# Altium PCB main.PcbDoc
Units mm, origin at the board's own origin, x right, y up, seen from the top; angles counter-clockwise.
Board outline 36 x 35 mm, 4 copper layers (Top Layer, Power Layer 1, Power Layer 2, Bottom Layer), stack 0.971 mm thick; 100 components, 57 nets, 322 pads, 175 vias.
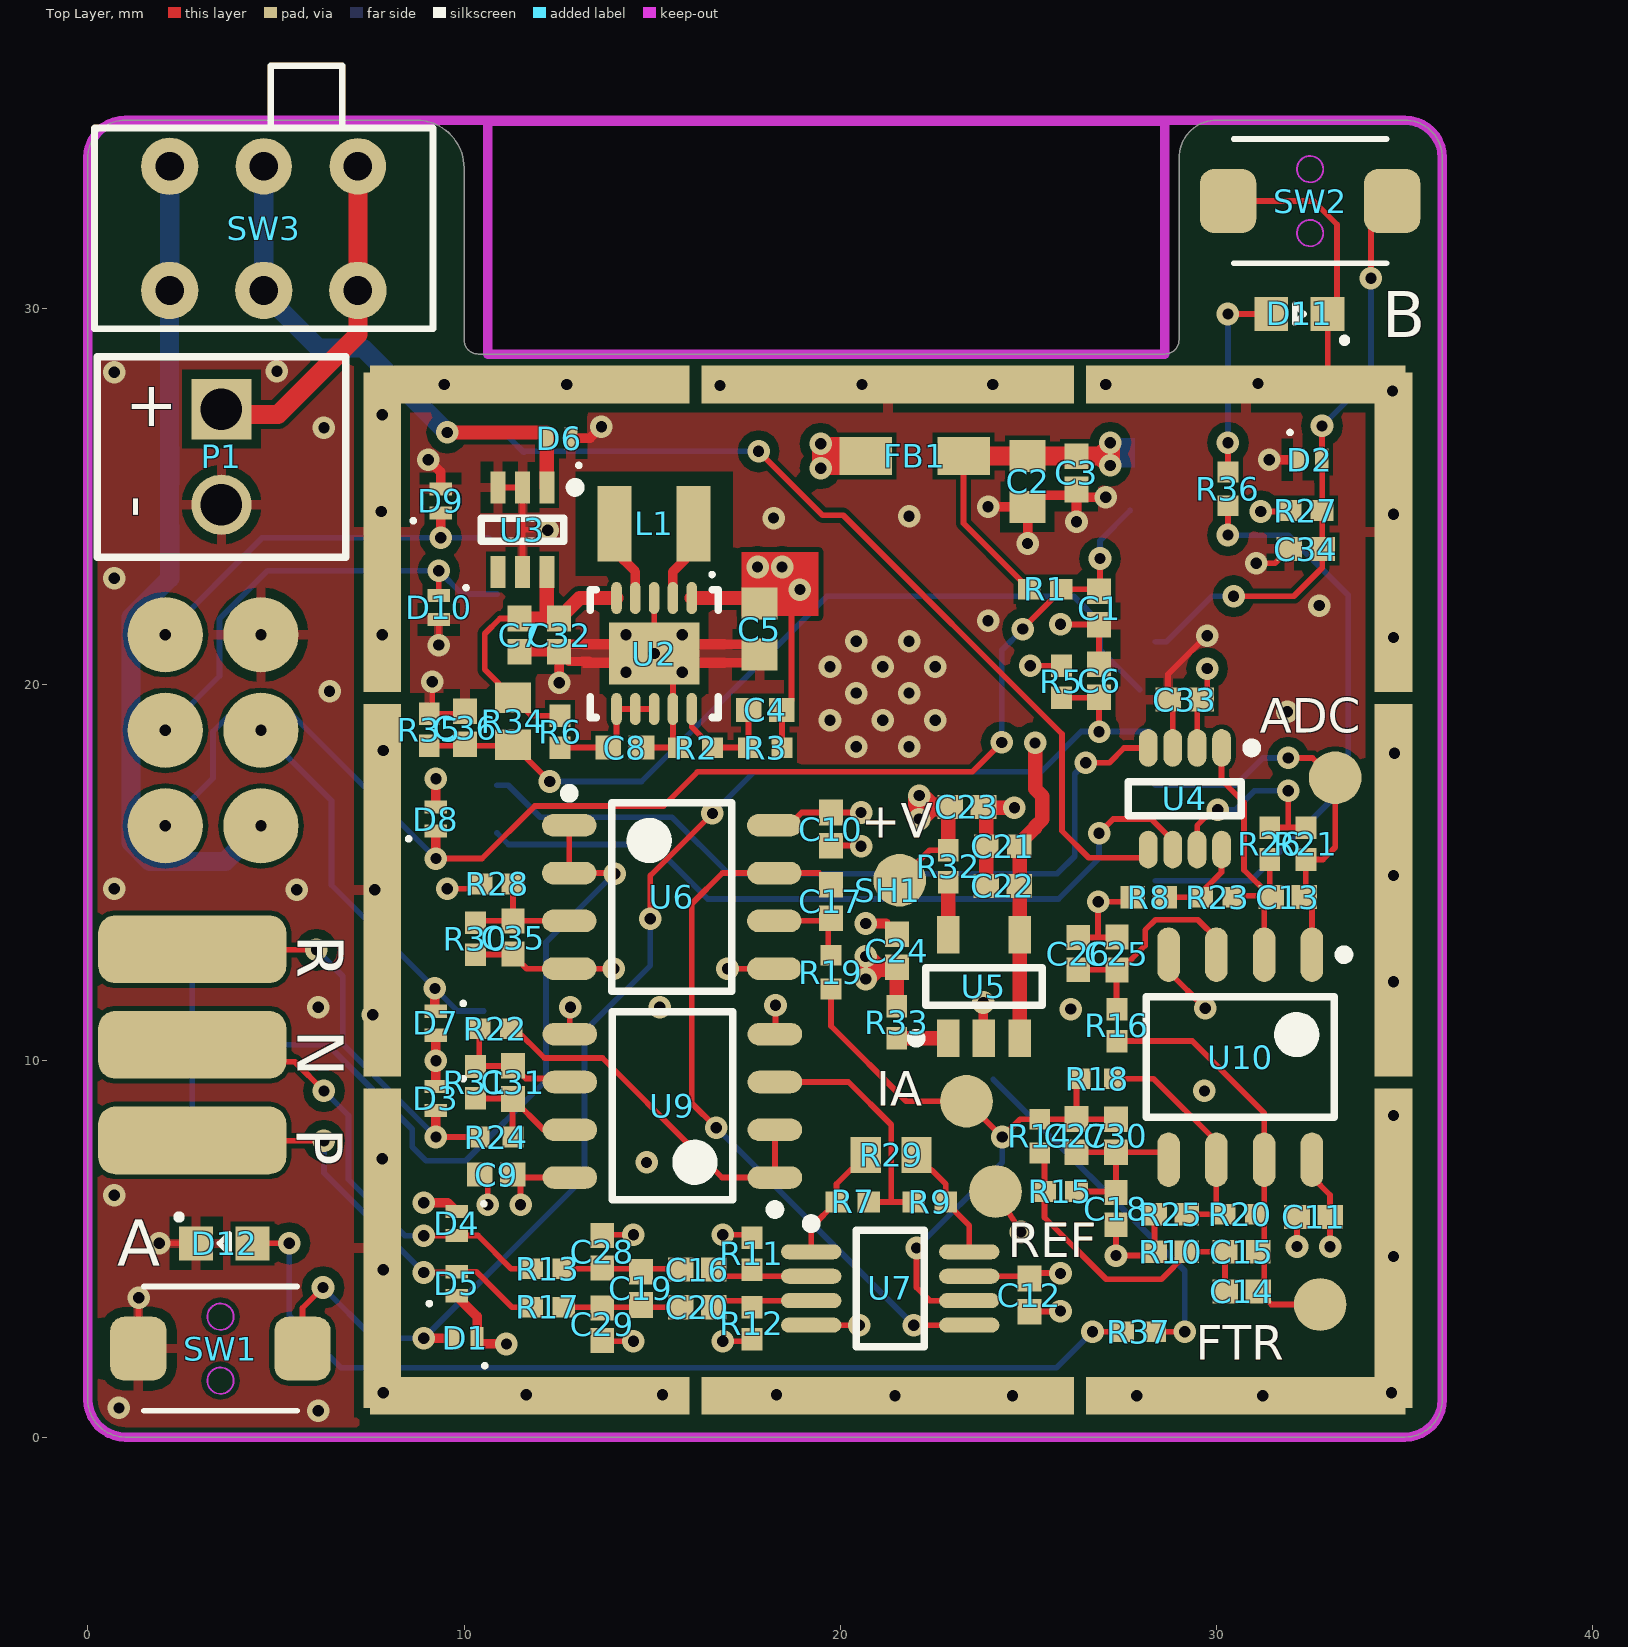
[diagram p0: Top Layer view]
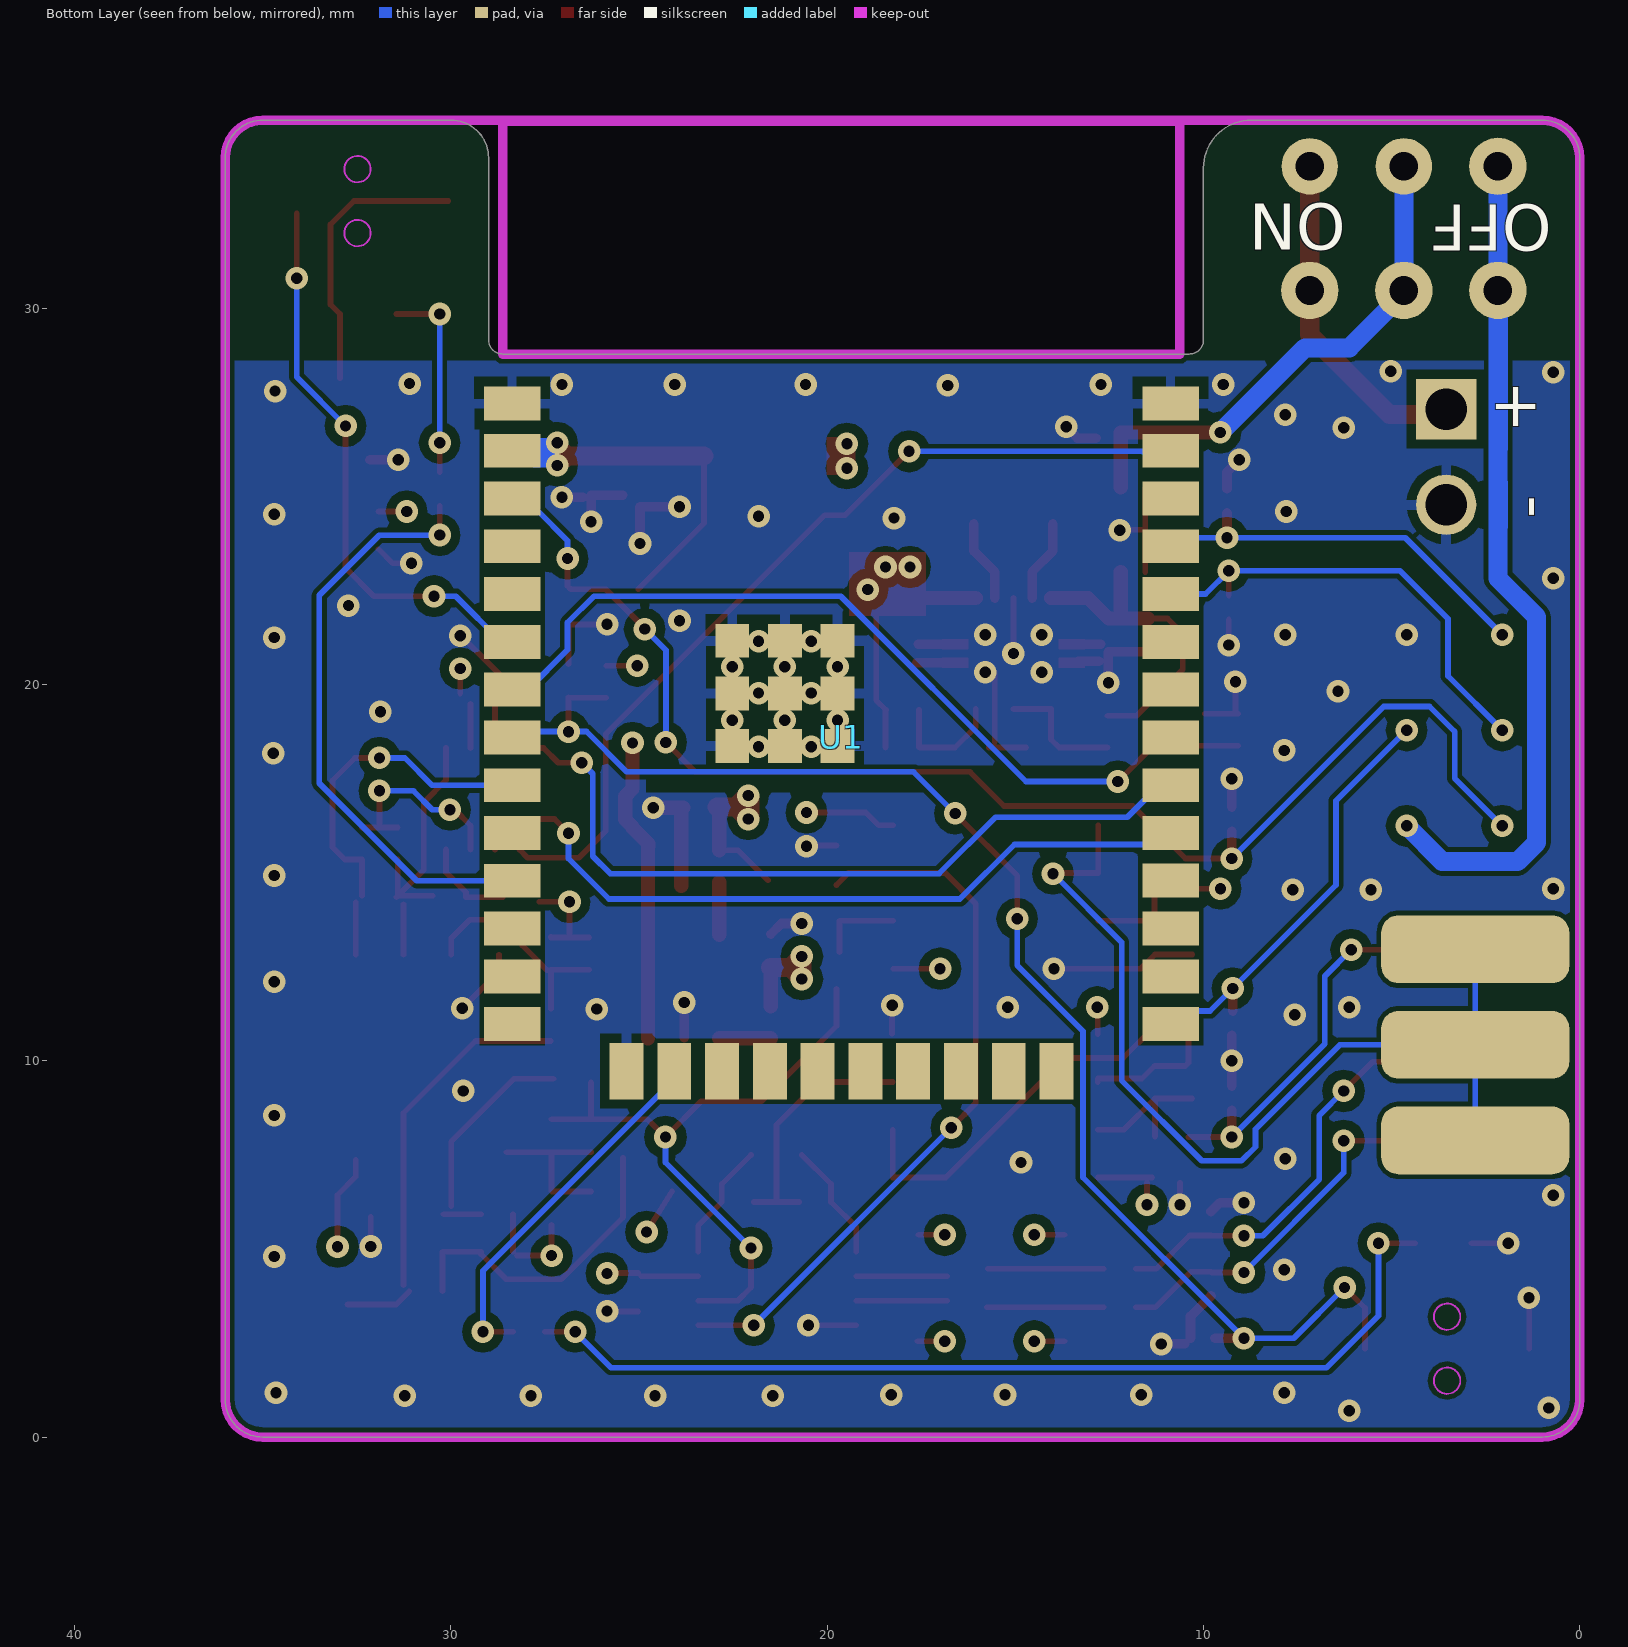
[diagram p1: Bottom Layer view, seen from below]
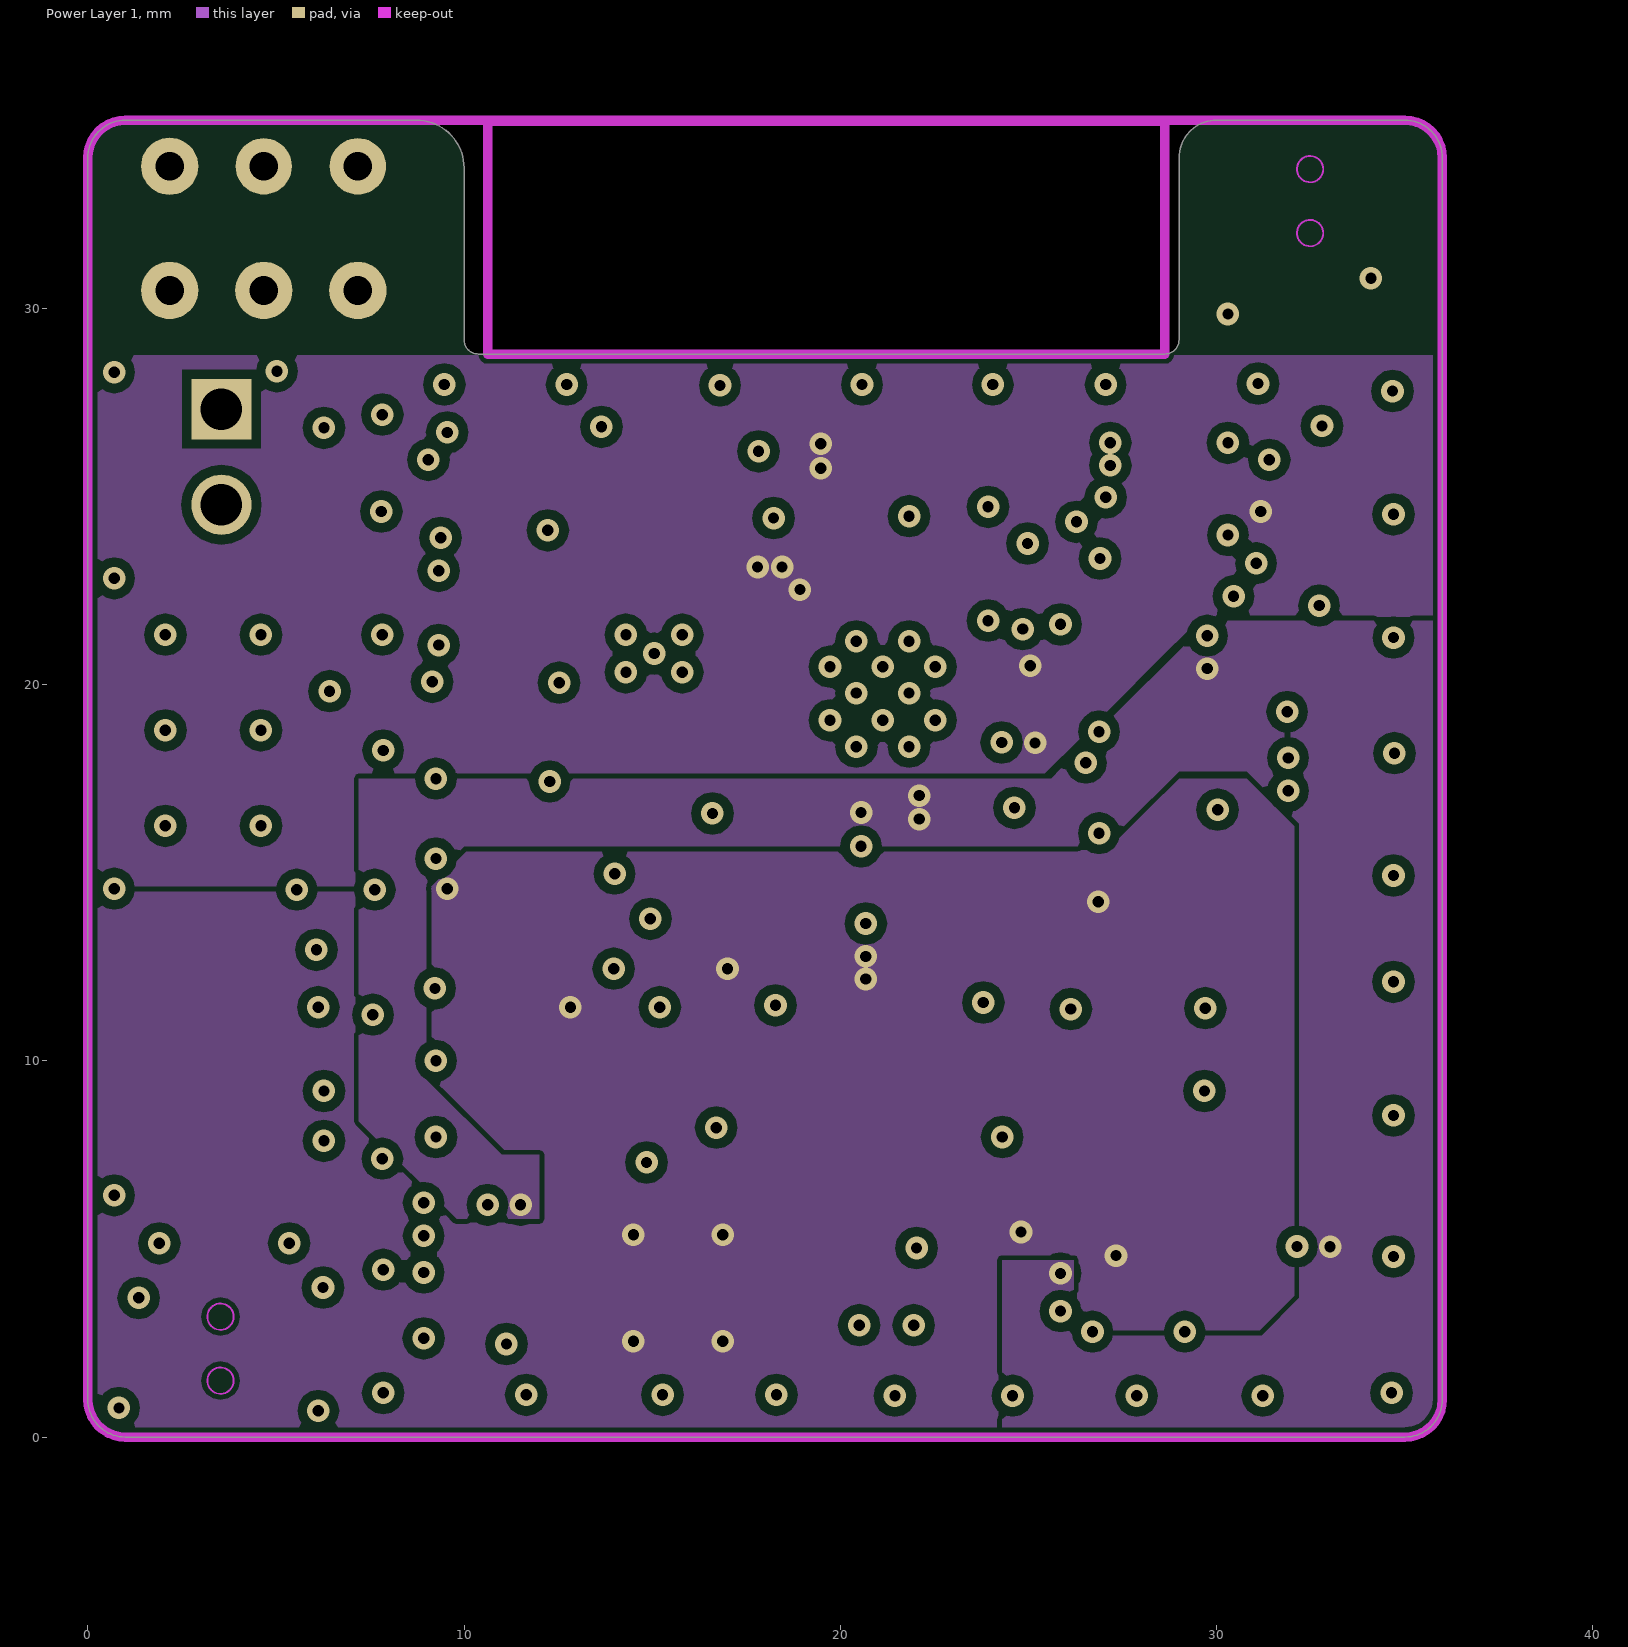
[diagram p2: Power Layer 1]
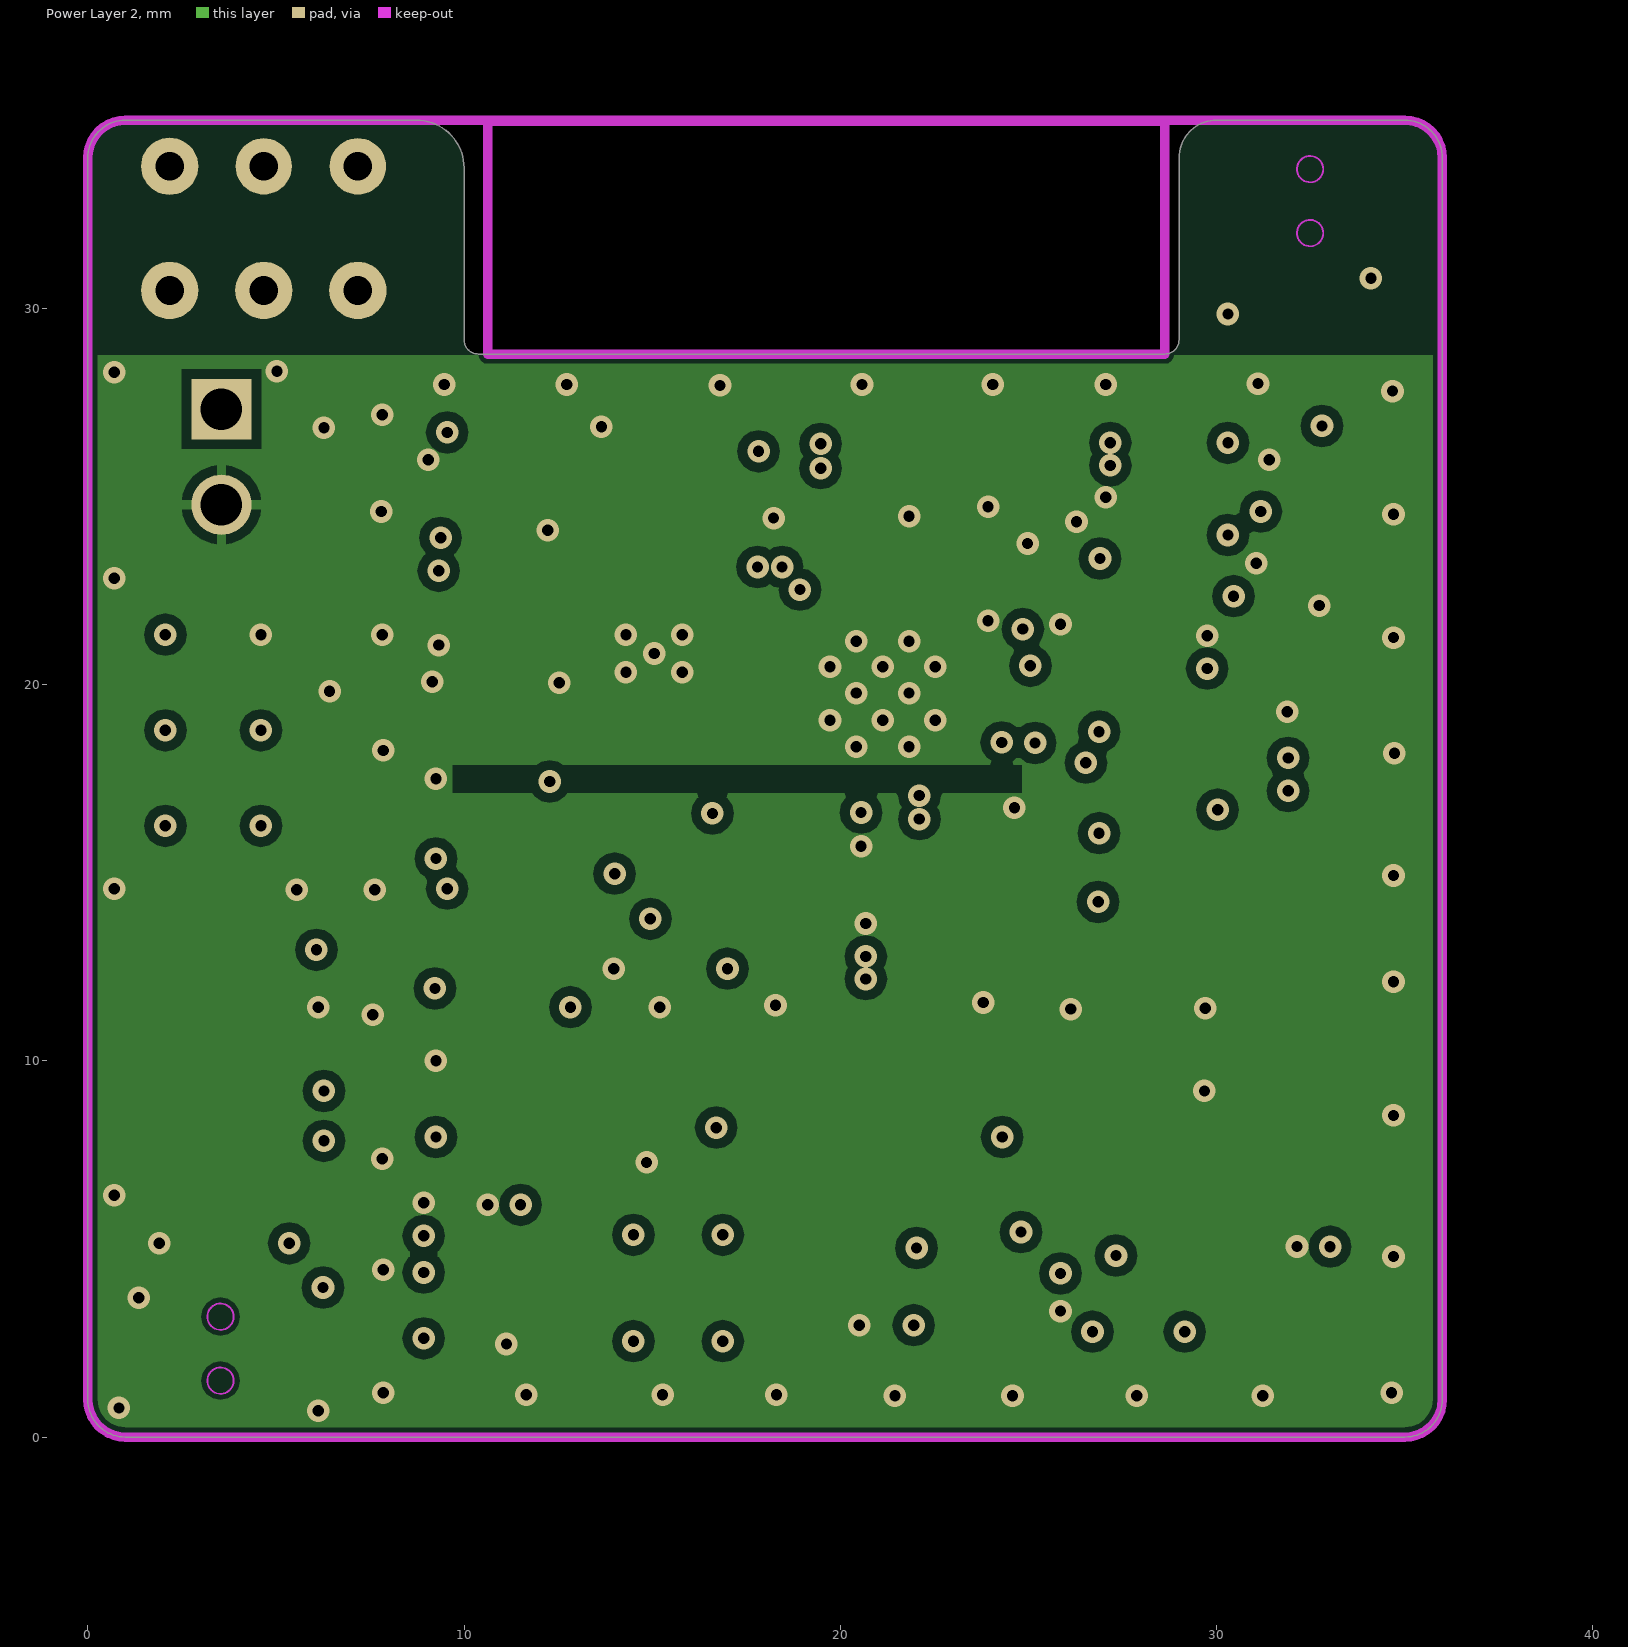
[diagram p3: Power Layer 2]

## Layer stack, top to bottom
Top Solder: solder mask 0.0127, Solder Resist, Dk 3.8
Top Layer: signal copper 0.035
7628: prepreg 0.2, FR-4, Dk 4.6
Power Layer 1: signal copper 0.0177
Core: core 0.465, FR-4, Dk 4.6
Power Layer 2: signal copper 0.0177
7628: prepreg 0.2, FR-4, Dk 4.6
Bottom Layer: signal copper 0.035
Bottom Solder: solder mask 0.0127, Solder Resist, Dk 3.8

## Board outline
0,1 ccw(c1,1) 1,0 35,0 ccw(c35,1) 36,1 36,34 ccw(c35,34) 35,35 30,35 ccw(c30,34) 29,34 29,29.16 cw(c28.625,29.16) 28.625,28.785 10.375,28.785 cw(c10.375,29.16) 10,29.16 10,33.73 ccw(c8.73,33.73) 8.73,35 1,35 ccw(c1,34) 0,34

## Design rules (kind name [scope] priority, off if disabled: settings)
AssemblyTestPointUsage AssemblyTestPointUsage_1 [All] p2:
AssemblyTestpoint AssemblyTestpoint_1 [All] p2: testpointundercomponent=TRUE minsize=1.016 maxsize=2.54 preferedsize=1.524 minholesize=0 maxholesize=1.016 preferedholesize=0.813 testpointgrid=0.025 usegrid=TRUE gridtolerance=0 allowsidetop=TRUE allowsidebottom=TRUE
Clearance [All] p1: gap=0.254 ignorepadtopadclearanceinfootprint=FALSE except(0: Arc-Hole Track-Hole SMDPad-Hole THPad-Hole Via-Hole Fill-Hole Poly-Hole Region-Hole Text-Hole)
Clearance RF_Clearance [InNetClass('RF')] p2: gap=0.254 ignorepadtopadclearanceinfootprint=FALSE except(0: Arc-Hole Track-Hole SMDPad-Hole THPad-Hole Via-Hole Fill-Hole Poly-Hole Region-Hole Text-Hole; 0.127: Arc-Arc Arc-Track Arc-SMDPad Arc-Fill Arc-Region Track-Track Track-SMDPad Track-Fill Track-Region SMDPad-SMDPad SMDPad-THPad SMDPad-Fill SMDPad-Region Fill-Fill Fill-Region Region-Region; 0.33: Arc-THPad Track-THPad; 0.54: THPad-THPad; 0.88: Arc-Poly Track-Poly SMDPad-Poly THPad-Poly Via-Poly Fill-Poly Poly-Poly Poly-Region Poly-Text)
Clearance Clearance_1 [All] p3: gap=0.254 ignorepadtopadclearanceinfootprint=FALSE except(0: Arc-Hole Track-Hole SMDPad-Hole THPad-Hole Via-Hole Fill-Hole Poly-Hole Region-Hole Text-Hole; 0.127: Arc-Arc Arc-Track Arc-SMDPad Arc-Fill Arc-Poly Arc-Region Track-Track Track-SMDPad Track-Fill Track-Poly Track-Region SMDPad-SMDPad SMDPad-THPad SMDPad-Fill SMDPad-Poly SMDPad-Region Fill-Fill Fill-Poly Fill-Region Poly-Poly Poly-Region Region-Region; 0.33: Arc-THPad Track-THPad; 0.54: THPad-THPad)
ComponentClearance ComponentClearance_1 [All] p2 off: gap=0.254 collisioncheckmode=3 verticalgap=0.254 showdistances=FALSE
DiffPairsRouting DiffPairsRouting_1 [All] p2: maxlimit=0.254 minlimit=0.254 mostfreqgap=0.254 toplayer_minwidth=0.381 toplayer_maxwidth=0.381 toplayer_prefwidth=0.381 midlayer1_minwidth=0.381 midlayer1_maxwidth=0.381 midlayer1_prefwidth=0.381 midlayer2_minwidth=0.381 midlayer2_maxwidth=0.381 midlayer2_prefwidth=0.381 bottomlayer_minwidth=0.381 bottomlayer_maxwidth=0.381 bottomlayer_prefwidth=0.381 maxuncoupledlength=12.7
FabricationTestPointUsage FabricationTestPointUsage_1 [All] p2: valid=0 allowmultiple=FALSE
FabricationTestpoint FabricationTestpoint_1 [All] p2: side=3 testpointundercomponent=TRUE minsize=1.016 maxsize=2.54 preferedsize=1.524 minholesize=0 maxholesize=1.016 preferedholesize=0.813 testpointgrid=0.025 allowsidetop=TRUE allowsidebottom=TRUE usegrid=TRUE gridtolerance=0
FanoutControl Fanout_LCC [IsLCC] p1: bgadir=Out bgaviamode=Centered fanoutstyle=Auto fanoutdirection=Alternating viagrid=0.025 // Fanout_LCC (Default Rule)
FanoutControl Fanout_BGA [IsBGA] p2: bgadir=Out bgaviamode=Centered fanoutstyle=Auto fanoutdirection=Alternating viagrid=0.025 // Fanout_BGA (Default Rule)
FanoutControl Fanout_Default [All] p4: bgadir=Out bgaviamode=Centered fanoutstyle=Auto fanoutdirection=Alternating viagrid=0.025 // Fanout_Default (Default Rule)
FanoutControl Fanout_Small [(CompPinCount < 5)] p5: bgadir=Out bgaviamode=Centered fanoutstyle=Auto fanoutdirection=OutThenIn viagrid=0.025 // Fanout_Small (Default Rule)
FanoutControl Fanout_BGA_1 [IsBGA] p6: bgadir=Out bgaviamode=Centered fanoutstyle=Auto fanoutdirection=Alternating viagrid=0.025 // Fanout_BGA (Default Rule)
FanoutControl Fanout_LCC_1 [IsLCC] p7: bgadir=Out bgaviamode=Centered fanoutstyle=Auto fanoutdirection=Alternating viagrid=0.025 // Fanout_LCC (Default Rule)
FanoutControl Fanout_SOIC_1 [IsSOIC] p8: bgadir=Out bgaviamode=Centered fanoutstyle=Auto fanoutdirection=Alternating viagrid=0.025 // Fanout_SOIC (Default Rule)
FanoutControl Fanout_Small_1 [(CompPinCount < 5)] p9: bgadir=Out bgaviamode=Centered fanoutstyle=Auto fanoutdirection=OutThenIn viagrid=0.025 // Fanout_Small (Default Rule)
FanoutControl Fanout_Default_1 [All] p10: bgadir=Out bgaviamode=Centered fanoutstyle=Auto fanoutdirection=Alternating viagrid=0.025 // Fanout_Default (Default Rule)
Height Height_1 [All] p2: minheight=0 maxheight=25.4 prefheight=12.7
HoleSize HoleSize_1 [All] p2: absolutevalues=TRUE maxlimit=6.35 minlimit=0.02 maxpercent=80.000 minpercent=20.000
HoleToHoleClearance HoleToHoleClearance_1 [All] p2: gap=0.254 allowstackedmicrovias=TRUE
LayerPairs LayerPairs_1 [All] p2: enforce=TRUE
MinimumAnnularRing [All] p1: minimumring=0.13
MinimumSolderMaskSliver MinimumSolderMaskSliver_1 [All] p2: minsoldermaskwidth=0.2
NetAntennae NetAntennae_1 [All] p2: netantennaetolerance=0
PasteMaskExpansion PasteMaskExpansion_1 [All] p2: expansion=0
PlaneClearance PlaneClearance_1 [All] p2: clearance=0.508
PlaneConnect PlaneConnect_1 [All] p2: planeconnectstyle=Direct reliefexpansion=0.508 reliefentries=4 reliefconductorwidth=0.254 reliefairgap=0.254
PolygonConnect [All] p1: connectstyle=Relief reliefconductorwidth=0.254 reliefentries=4 polygonreliefangle="90 Angle" airgapwidth=0.254
PolygonConnect PolygonConnect_Via [IsVia] p2: connectstyle=Direct reliefconductorwidth=0.254 reliefentries=4 polygonreliefangle="90 Angle" airgapwidth=0.254
PolygonConnect PolygonConnect_1 [All] p3: connectstyle=Relief reliefconductorwidth=0.254 reliefentries=4 polygonreliefangle="90 Angle" airgapwidth=0.254
RoutingCorners RoutingCorners_1 [All] p2: cornerstyle=45-Degree minsetback=2.54 maxsetback=2.54
RoutingLayers RoutingLayers_1 [All] p2: top layer_v5=TRUE mid layer 1_v5=TRUE mid layer 2_v5=TRUE bottom layer_v5=TRUE
RoutingPriority RoutingPriority_1 [All] p2: routingpriority=0
RoutingTopology RoutingTopology_1 [All] p2: topology=Shortest
RoutingVias [All] p1: holewidth=0.711 width=1.27 viastyle="Through Hole" minholewidth=0.711 minwidth=1.27 maxholewidth=0.711 maxwidth=1.27
RoutingVias RoutingVias_1 [All] p2: holewidth=1 width=0.6 viastyle="Through Hole" minholewidth=0.2 minwidth=0.45 maxholewidth=6.3 maxwidth=7
ShortCircuit ShortCircuit_1 [All] p2: allowed=FALSE
SilkToBoardRegionClearance SilkToBoardRegionClearance_1 [All] p2:
SilkToSilkClearance SilkToSilkClearance_1 [All] p2: silktosilkclearance=0.15
SilkToSolderMaskClearance SilkToSolderMaskClearance_1 [IsPad] p2: minsilkscreentomaskgap=0.15 clearancetoexposedcopper=TRUE
SolderMaskExpansion [All] p1: expansion=0.102 istentingtop=FALSE
SolderMaskExpansion SolderMaskExpansion_1 [All] p2: expansion=0.102 istentingtop=FALSE
UnRoutedNet UnRoutedNet_1 [All] p2:
UnpouredPolygon UnpouredPolygon_1 [All] p2:
Width [All] p1: maxlimit=0.254 minlimit=0.254 preferedwidth=0.254
Width Width_1 [All] p2: maxlimit=2.54 minlimit=0.089 preferedwidth=0.254 midlayer1_minwidth=0.127 midlayer1_maxwidth=1.27 midlayer2_minwidth=0.127 midlayer2_maxwidth=1.27 minimp=50.000000 maximp=50.000000 favimp=50.000000
26 further rules are at their usual default settings.

## Components (designator, comment, footprint, x,y, rotation, side; value= is the part's Value field where it differs from the comment)
C1 "100nF" CAPC1005X56X25NL10T15 26.875,22.035 r270 top
C2 "Murata GRM188R60G226MEA0L" CAPC1608X90X35NL10T15 24.975,25.4 r270 top
C3 "100nF" CAPC1005X56X25NL10T15 26.275,25.625 r270 top
C4 "AVX Interconnect / Elco 04025A6R0DAT2A" CAPC1005X60X25NL10T15 18,19.325 r180 top
C5 "Murata GRM188R60G226MEA0L" CAPC1608X90X35NL10T15 17.85,21.475 r270 top
C6 "100nF" CAPC1005X56X25NL10T15 26.875,20.1 r90 top
C7 "100nF" CAPC1005X56X25NL10T15 11.475,21.315 r270 top
C8 "100nF" CAPC1005X56X25NL10T15 14.275,18.325 r0 top
C9 "100nF" CAPC1005X56X25NL10T15 10.85,6.975 r180 top
C10 "100nF" CAPC1005X56X25NL10T15 19.75,16.16 r270 top
C11 "100nF" CAPC1005X56X25NL10T15 32.575,5.85 r180 top
C12 "100nF" CAPC1005X56X25NL10T15 25.025,3.775 r270 top
C13 "AVX Interconnect / Elco 04025C152KAT2A" CAPC1005X56X25NL10T15 31.89,14.35 r180 top
C14 "AVX Interconnect / Elco 0402ZD474KAT2A" CAPC1005X56X25NL10T15 30.665,3.875 r0 top
C15 "CL05A334KQ5NNNC" CAPC1005X55X25NL05T10 30.665,4.925 r180 top
C16 "CL05A475MP5NRNC" CAPC1005X56X25NL10T15 16.2,4.45 r0 top
C17 "Samsung CL05A105KA5NQNC" PCB-515da9ytrm2wahx6tw11-1 19.75,14.235 r90 top
C18 "Kemet C0402C683K4RACTU" CAPC1005X55X30NL05T10 27.325,6.075 r90 top
C19 "AVX Interconnect / Elco 04025C332KAT2A" CAPC1005X56X25NL10T15 14.7,3.95 r90 top
C20 "CL05A475MP5NRNC" CAPC1005X56X25NL10T15 16.2,3.45 r180 top
C21 "Murata GRM155R61C105KA12D" CAPC1005X55X25NL05T10 24.315,15.7 r180 top
C22 "100nF" CAPC1005X56X25NL10T15 24.315,14.65 r180 top
C23 "100nF" CAPC1005X56X25NL10T15 23.365,16.75 r0 top
C24 "100nF" CAPC1005X56X25NL10T15 21.5,12.925 r90 top
C25 "CL05A334KQ5NNNC" CAPC1005X55X25NL05T10 27.35,12.85 r270 top
C26 "Kemet C0402C683K4RACTU" CAPC1005X55X30NL05T10 26.325,12.85 r270 top
C27 "AVX Interconnect / Elco 04023C473KAT2A" CAPC1005X56X25NL10T15 26.275,8.015 r270 top
C28 "Kemet C0402C221K5RACAUTO" CAPC1005X55X30NL05T10 13.675,4.925 r90 top
C29 "Kemet C0402C221K5RACAUTO" CAPC1005X55X30NL05T10 13.675,3 r270 top
C30 "100nF" CAPC1005X56X25NL10T15 27.325,8.01 r270 top
C31 "AVX Interconnect / Elco 04025A151JAT2A" CAPC1005X56X25NL10T15 11.3,9.425 r90 top
C32 "Samsung CL05A106MQ5NUNC" PCB-a41llqp6xpt8gy62f2hk-1 12.525,21.315 r270 top
C33 "100nF" CAPC1005X56X25NL10T15 29.15,19.6 r180 top
C34 "100nF" CAPC1005X56X25NL10T15 32.365,23.6 r180 top
C35 "Murata GRM155R61C105KA12D" CAPC1005X55X25NL05T10 11.3,13.275 r270 top
C36 "100nF" CAPC1005X56X25NL10T15 10.025,18.85 r90 top
D1 "LESD8D3.3CT5G" DFN64P100X50-2N 10.025,2.625 r180 top
D2 "LESD8D3.3CT5G" DFN64P100X50-2N 32.475,25.975 r0 top
D3 "LESD8D3.3CT5G" DFN64P100X50-2N 9.25,9 r270 top
D4 "LESD8D3.3CT5G" DFN64P100X50-2N 9.8,5.675 r270 top
D5 "LESD8D3.3CT5G" DFN64P100X50-2N 9.8,4.075 r90 top
D6 "LESD8D3.3CT5G" DFN64P100X50-2N 12.525,26.55 r180 top
D7 "LESD8D3.3CT5G" DFN64P100X50-2N 9.25,11 r270 top
D8 "LESD8D3.3CT5G" DFN64P100X50-2N 9.25,16.425 r90 top
D9 "LESD8D3.3CT5G" DFN64P100X50-2N 9.375,24.88 r90 top
D10 "LESD8D3.3CT5G" DFN64P100X50-2N 9.325,22.05 r270 top
D11 "19-217/GHC-YR1S2/3T" PCB-qrh50x9m6cshxb6d9t7t-1 32.2,29.85 r180 top
D12 "KT-0603R" PCB-qrh50x9m6cshxb6d9t7t-1 3.625,5.15 r0 top
FB1 "GZ2012D601TF" MURA-BLM21-H1-CHIP-2_V 21.975,26.075 r0 top
L1 "Laird MGV252012S2R2M-10" INDM2520X12N 15.05,24.275 r0 top
P1 "TE 282834-2" PCB-6xrngco598u3mra2uzi2-1 3.55,26.05 r270 top
R1 "Yageo / Phycomp RC0402FR-1310KL" RESC1005X40X25NL05T10 25.45,22.535 r0 top
R2 "Panasonic ERJ-2RKF8872X" RESC1005X40X25NL05T05 16.15,18.325 r0 top
R3 "Vishay Dale CRCW0402510KFKED" RESC1005X40X25NL05T05 18,18.325 r0 top
R5 "Yageo / Phycomp RC0402FR-1310KL" RESC1005X40X25NL05T10 25.875,20.075 r270 top
R6 "Yageo RC0402FR-13100RL" RESC1005X40X25NL05T10 12.55,18.75 r90 top
R7 "Yageo / Phycomp RC0402FR-0724KL" RESC1005X40X25NL05T10 20.325,6.25 r0 top
R8 "KOA Speer RK73H1ETTP1001F" RESC1005X40X25NL10T10 28.2,14.35 r180 top
R9 "Yageo / Phycomp RC0402FR-0724KL" RESC1005X40X25NL05T10 22.375,6.25 r0 top
R10 "KOA Speer RK73H1ETTP2003F" RESC1005X40X25NL10T10 28.775,4.925 r0 top
R11 "Yageo RC0402FR-13100KL" RESC1005X40X25NL05T10 17.65,4.875 r270 top
R12 "Yageo RC0402FR-13100KL" RESC1005X40X25NL05T10 17.65,3.025 r90 top
R13 "Yageo RC0402FR-13100KL" RESC1005X40X25NL05T10 12.225,4.475 r180 top
R14 "Vishay Dale CRCW04026K80FKED" RESC1005X40X25NL05T05 25.3,8 r270 top
R15 "Yageo / Phycomp RC0402FR-0716KL" RESC1005X40X25NL05T10 25.85,6.525 r0 top
R16 "Yageo / Phycomp RC0402FR-0711KL" RESC1005X40X25NL05T10 27.35,10.95 r270 top
R17 "Yageo RC0402FR-13100KL" RESC1005X40X25NL05T10 12.225,3.45 r180 top
R18 "Panasonic ERJ-2RKF2002X" RESC1005X40X25NL05T05 26.825,9.525 r180 top
R19 "Vishay Dale CRCW0402330KFKED" RESC1005X40X25NL05T05 19.75,12.36 r270 top
R20 "Yageo / Phycomp RC0402FR-1310KL" RESC1005X40X25NL05T10 30.625,5.925 r180 top
R21 "Yageo AC0402FR-078K2L" RESC1005X37X25NL05T10 32.375,15.775 r270 top
R22 "Yageo / Phycomp RC0402FR-1310KL" RESC1005X40X25NL05T10 10.825,10.85 r0 top
R23 "Yageo / Phycomp RC0402FR-1310KL" RESC1005X40X25NL05T10 30.025,14.35 r0 top
R24 "Vishay Dale CRCW0402330KFKED" RESC1005X40X25NL05T05 10.85,7.975 r0 top
R25 "KOA Speer RK73H1ETTP2003F" RESC1005X40X25NL10T10 28.775,5.925 r0 top
R26 "Yageo / Phycomp RC0402FR-1310KL" RESC1005X40X25NL05T10 31.415,15.775 r270 top
R27 "Yageo / Phycomp RC0402FR-1310KL" RESC1005X40X25NL05T10 32.375,24.625 r0 top
R28 "Yageo AC0402JR-070RL" RESC1005X37X25NL05T10 10.875,14.7 r180 top
R29 "Panasonic ERJ-3EKF71R5V" RESC1608X55X30NL15T15 21.35,7.5 r0 top
R30 "Yageo AC0402JR-070RL" RESC1005X37X25NL05T10 10.3,13.25 r90 top
R31 "Yageo AC0402FR-071ML" RESC1005X37X25NL05T10 10.3,9.425 r270 top
R32 "Yageo AC0402JR-070RL" RESC1005X37X25NL05T10 22.865,15.175 r270 top
R33 "Yageo AC0402JR-070RL" RESC1005X37X25NL05T10 21.5,11.025 r270 top
R34 "Vishay Dale CRCW0603680KFKEA" RESC1609X50X30NL10T20 11.3,19.025 r270 top
R35 "Yageo AC0402FR-071ML" RESC1005X37X25NL05T10 9.075,18.8 r90 top
R36 "Vishay Dale CRCW0402220RFKED" RESC1005X40X25NL05T05 30.3,25.2 r270 top
R37 "Panasonic ERJ-U02F1001X" RESC1005X40X25NL05T10 27.925,2.8 r0 top
SH1 "Leader Tech SMS-403C" PCB-mz3zksww60jqn1djdwiu-1 34.7,27.975 r270 top locked
SW1 "TS-1185-C-A-A-A" PCB-qarcnbrnejma51b9hfzm-1 3.525,2.35 r0 top
SW2 "TS-1185-C-A-A-A" PCB-qarcnbrnejma51b9hfzm-1 32.484,32.85 r0 top
SW3 "JS202011AQN" PCB-wbq3apgbd2bliremr4t3-1 9.175,30.475 r180 top
U1 "Espressif Systems ESP32-WROOM-32E" ESP32-WROOM-32E 28.625,9.475 r180 bottom locked
U2 "TPS63000DRCRG4" DRC10-2400X1650TP 15.05,20.825 r270 top
U3 "LM66100DCKR" TSOP65P210X110-6N 11.55,24.115 r270 top
U4 "Analog Devices AD5160BRJZ10-RL7" TSOP65P280X145-8N 29.157,16.966 r270 top
U5 "REF1933AIDDCT" SOT95P280X100-5N 23.815,11.975 r90 top
U6 "MCP6002T-I/SN" SOIC127P600X175-8N 15.519,14.355 r0 top
U7 "INA126EA/2K5" TI-DGK8_N 21.325,3.95 r0 top
U9 "MCP6002T-I/SN" SOIC127P600X175-8N 15.535,8.803 r180 top
U10 "MCP6002T-I/SN" SOIC127P600X175-8N 30.628,10.097 r270 top

## Footprints (in the part's own frame and the unit in brackets; to place one, negate y for a bottom-side part, rotate by r counter-clockwise, add the part's x,y. Pads: shape width x height; smd on the part's side, far side on the other; paste and mask are expansions set on the pad)
CAPC1005X55X25NL05T10 [mm] "CAPC1005X55X25NL05T10"
  rect 0.66x0.62 smd: 1(-0.44,0) 2(0.44,0)
  body extent -0.53,-0.28 0.53,0.27, height 0.55
CAPC1005X55X30NL05T10 [mm] "CAPC1005X55X30NL05T10"
  rect 0.66x0.62 smd: 1(-0.43,0) 2(0.43,0)
  body extent -0.53,-0.28 0.53,0.27, height 0.55
CAPC1005X56X25NL10T15 [mm] "CAPC1005X56X25NL10T15"
  rect 0.68x0.64 smd: 1(-0.44,0) 2(0.44,0)
  body extent -0.55,-0.3 0.55,0.3, height 0.56
CAPC1005X60X25NL10T15 [mm] "CAPC1005X60X25NL10T15"
  rect 0.68x0.64 smd: 1(-0.44,0) 2(0.44,0)
  body extent -0.55,-0.3 0.55,0.3, height 0.6
CAPC1608X90X35NL10T15 [mm] "CAPC1608X90X35NL10T15"
  rect 0.85x0.95 smd: 1(-0.675,0) 2(0.675,0)
  body extent -0.85,-0.45 0.85,0.45, height 0.9
DFN64P100X50-2N [mm] "DFN, 2-Leads, Body 0.60x1.00mm, Pitch 0.64mm, IPC Medium Density"
  rect 0.35x0.6 smd: 1(-0.32,0) 2(0.32,0)
  silkscreen extent -0.58,0.68 -0.48,0.77, body extent -0.53,-0.33 0.53,0.33, height 0.5
DRC10-2400X1650TP [mm] "SON, 10-Leads, Body 3x3mm, Pitch 0.5mm, Thermal Pad 2.4x1.65mm, TI Recommended"
  oval 0.85x0.28 smd paste-0.025 mask+0.07: 1(-1.475,1) 2(-1.475,0.5) 3(-1.475,0) 4(-1.475,-0.5) 5(-1.475,-1) 6(1.475,-1) 7(1.475,-0.5) 8(1.475,0) 9(1.475,0.5) 10(1.475,1)
  rect 1.65x2.4 smd paste-0.825 mask+0.07: 11(0,0)
  Top Layer region: -0.39,1.2 -0.11,1.2 -0.11,1.9 -0.39,1.9
  Top Layer region: 0.39,1.9 0.11,1.9 0.11,1.2 0.39,1.2
  Top Layer region: 0.39,-1.2 0.11,-1.2 0.11,-1.9 0.39,-1.9
  Top Layer region: -0.39,-1.9 -0.11,-1.9 -0.11,-1.2 -0.39,-1.2
  silkscreen extent -2.15,-1.7 1.7,1.7, body extent -1.55,-1.55 1.55,1.55, height 1
ESP32-WROOM-32E [mm] "ESP32-WROOM-32E"
  rect 1.5x0.9 smd: 1(0.25,18) 2(0.25,16.74) 3(0.25,15.47) 4(0.25,14.2) 5(0.25,12.93) 6(0.25,11.66) 7(0.25,10.39) 8(0.25,9.12) 9(0.25,7.85) 10(0.25,6.58) 11(0.25,5.31) 12(0.25,4.04) 13(0.25,2.77) 14(0.25,1.5) 25(17.75,1.5) 26(17.75,2.77) 27(17.75,4.04) 28(17.75,5.32) 29(17.75,6.58) 30(17.75,7.85) 31(17.75,9.12) 32(17.75,10.39) 33(17.75,11.66) 34(17.75,12.93) 35(17.75,14.2) 36(17.75,15.47) 37(17.75,16.74) 38(17.75,18)
  rect 0.9x1.5 smd: 15(3.29,0.25) 16(4.56,0.25) 17(5.83,0.25) 18(7.1,0.25) 19(8.37,0.25) 20(9.64,0.25) 21(10.91,0.25) 22(12.18,0.25) 23(13.45,0.25) 24(14.72,0.25)
  rect 0.9x0.9 smd: 39(6.1,8.89) 39(6.1,10.29) 39(6.1,11.69) 39(7.5,8.89) 39(7.5,10.29) 39(7.5,11.69) 39(8.9,8.89) 39(8.9,10.29) 39(8.9,11.69)
  Keep-Out Layer lines w0.254: 18,19.31 0,19.31 0,25.5 18,25.5 18,19.31
  body extent 0,0 18,25.5, height 3.2
INDM2520X12N [mm] "Molded Inductor, 2-Leads, Body 2.50x2.00mm, IPC Medium Density"
  rect 0.9x2 smd: 1(-1.05,0) 2(1.05,0)
  body extent -1.35,-1.1 1.35,1.1, height 1.2
MURA-BLM21-H1-CHIP-2_V [mm] "Chip Ferrite Bead, 2-Leads, Body 2x1.25mm, Height 1.05mm"
  rect 1.4x1 smd: 1(-1.3,0) 2(1.3,0)
  body extent -1,-0.63 1,0.63, height 1.05
PCB-6xrngco598u3mra2uzi2-1 [mm] "terminal block 2x20cts, Pitch 2.54mm"
  rect 1.6x1.6 hole 1.1: 1(-1.27,0)
  round 1.6 hole 1.1: 2(1.27,0)
  silkscreen extent -2.67,-3.3 2.67,3.3, body extent -2.77,-3.25 2.77,3.25, height 10.16
PCB-515da9ytrm2wahx6tw11-1 [mm] "CAPC1005X56X25NL10T15"
  rect 0.68x0.64 smd: 1(-0.44,0) 2(0.44,0)
  body extent -0.55,-0.3 0.55,0.3, height 0.56
PCB-a41llqp6xpt8gy62f2hk-1 [mm] "CAPC1005X56X25NL10T15"
  rect 0.68x0.64 smd: 1(-0.44,0) 2(0.44,0)
  body extent -0.55,-0.3 0.55,0.3, height 0.56
PCB-mz3zksww60jqn1djdwiu-1 [mm]
  rect 1x8.5 smd: 1(0,-3.925) 1(0,-22.955) 1(26.88,-3.925) 1(26.88,-22.955)
  rect 1x9.9 smd: 1(0,-13.44) 1(26.88,-13.44)
  rect 8.5x1 smd: 1(3.925,0) 1(3.925,-26.88) 1(22.955,0) 1(22.955,-26.88)
  rect 9.9x1 smd: 1(13.44,0) 1(13.44,-26.88)
PCB-qarcnbrnejma51b9hfzm-1 [mm]
  rrect50% 1.5x1.7 smd: 1(-2.18,0) 2(2.18,0)
  Keep-Out Layer circle w0.051: c0,-0.85 r0.35
  Keep-Out Layer circle w0.051: c0,0.85 r0.35
  Multi-Layer pour cut-out: 0,0.5 -0.134,0.527 -0.247,0.603 -0.323,0.716 -0.35,0.85 -0.35,0.85 -0.35,0.85 -0.323,0.984 -0.247,1.097 -0.134,1.173 0,1.2 0,1.2 0,1.2 0.134,1.173 0.247,1.097 0.323,0.984 0.35,0.85 0.35,0.85 0.323,0.716 0.247,0.603 0.134,0.527 0,0.5
  silkscreen extent -2.03,-1.65 2.03,1.65, body extent -2.5,-1.5 2.5,1.5, height 2
PCB-qrh50x9m6cshxb6d9t7t-1 [mm] "DSMD0603GRID25PAD90"
  rect 0.9x0.9 smd: 1(0.75,0) 2(-0.75,0)
  silkscreen extent -1.28,-0.25 0.13,0.77, body extent -0.87,-0.48 0.87,0.47, height 0.92
PCB-wbq3apgbd2bliremr4t3-1 [mm]
  round 1.5 hole 0.75: 1(2,-3.3) 2(4.5,-3.3)
  round 1.524 hole 0.762: 3(7,-3.3) 4(2,0) 5(4.5,0) 6(7,0)
  silkscreen extent 0,-5.97 9,1.02, body extent 0,-5.45 9,0.15, height 3.22
RESC1005X37X25NL05T10 [mm] "RESC1005X37X25NL05T10"
  rect 0.6x0.55 smd: 1(-0.425,0) 2(0.425,0)
  body extent -0.53,-0.27 0.53,0.28, height 0.37
RESC1005X40X25NL05T05 [mm] "RESC1005X40X25NL05T05"
  rect 0.55x0.55 smd: 1(-0.45,0) 2(0.45,0)
  body extent -0.53,-0.27 0.53,0.28, height 0.4
RESC1005X40X25NL05T10 [mm] "RESC1005X40X25NL05T10"
  rect 0.6x0.55 smd: 1(-0.425,0) 2(0.425,0)
  body extent -0.53,-0.27 0.53,0.28, height 0.4
RESC1005X40X25NL10T10 [mm] "RESC1005X40X25NL10T10"
  rect 0.65x0.6 smd: 1(-0.425,0) 2(0.425,0)
  body extent -0.55,-0.3 0.55,0.3, height 0.4
RESC1608X55X30NL15T15 [mm] "RESC1608X55X30NL15T15"
  rect 0.8x0.95 smd: 1(-0.675,0) 2(0.675,0)
  body extent -0.87,-0.48 0.87,0.48, height 0.55
RESC1609X50X30NL10T20 [mm] "RESC1609X50X30NL10T20"
  rect 0.8x0.95 smd: 1(-0.625,0) 2(0.625,0)
  body extent -0.82,-0.48 0.82,0.48, height 0.5
SOIC127P600X175-8N [mm] "SOIC, 8-Leads, Body 4.90x3.90mm, Pitch 1.27mm, IPC Medium Density"
  oval 1.45x0.6 smd: 1(-2.725,1.905) 2(-2.725,0.635) 3(-2.725,-0.635) 4(-2.725,-1.905) 5(2.725,-1.905) 6(2.725,-0.635) 7(2.725,0.635) 8(2.725,1.905)
  silkscreen extent -2.85,-2.5 1.6,2.88, body extent -2,-2.5 2,2.5, height 1.75
SOT95P280X100-5N [mm] "SOT23, 5-Leads, Body 2.90x2.80mm, Pitch 0.95mm, IPC Medium Density"
  rect 1x0.6 smd: 1(-1.375,0.95) 2(-1.375,0) 3(-1.375,-0.95) 4(1.375,-0.95) 5(1.375,0.95)
  silkscreen extent -1.5,-1.55 0.5,1.92, body extent -0.88,-1.52 0.87,1.53, height 1
TI-DGK8_N [mm] "SOP, 8-Leads, Body 3.1x3.1mm, Pitch 0.65mm, IPC Medium Density"
  oval 1.6x0.4 smd: 1(-2.1,0.975) 2(-2.1,0.325) 3(-2.1,-0.325) 4(-2.1,-0.975) 5(2.1,-0.975) 6(2.1,-0.325) 7(2.1,0.325) 8(2.1,0.975)
  silkscreen extent -2.22,-1.55 0.9,1.85, body extent -1.55,-1.55 1.55,1.55, height 1.1
TSOP65P210X110-6N [mm] "TSOP, 6-Leads, Body 2.00x1.25mm, Pitch 0.65mm, IPC Medium Density"
  rect 0.85x0.4 smd: 1(-1.125,0.65) 2(-1.125,0) 3(-1.125,-0.65) 4(1.125,-0.65) 5(1.125,0) 6(1.125,0.65)
  silkscreen extent -1.25,-1.1 0.3,1.53, body extent -0.7,-1.1 0.7,1.1, height 1.1
TSOP65P280X145-8N [mm] "TSOP, 8-Leads, Body 2.90x1.60mm, Pitch 0.65mm, IPC Medium Density"
  oval 1x0.5 smd: 1(-1.35,0.975) 2(-1.35,0.325) 3(-1.35,-0.325) 4(-1.35,-0.975) 5(1.35,-0.975) 6(1.35,-0.325) 7(1.35,0.325) 8(1.35,0.975)
  silkscreen extent -1.47,-1.5 0.45,1.9, body extent -0.85,-1.5 0.85,1.5, height 1.45

## Part data
C1 C3 C6 C7 C8 C9 C10 C11 C12 C22 C23 C24 C30 C33 C34 C36: library part CMP-bf2276a55d9a60e5-19, "Ceramic capacitor SMD-0402 100nF /16V X7R# K +-10%, Samsung, RoHS"
C2 C5: library part CMP-122043-3, "Cap Ceramic 22uF 6.3V X5R 20% SMD 0603 85C Embossed T/R"
C4: library part CMP-173346-2, "Multilayer Ceramic Capacitors MLCC - SMD/SMT 50volts 6pF C0G"
C13: library part CMP-126494-2, "Cap Ceramic 0.0015uF 50V X7R 10% SMD 0402 125C Paper T/R"
C14: library part CMP-4106702-2, "Multilayer Ceramic Capacitors MLCC - SMD/SMT 10volts 0.47uF 10% X5R"
C15 C25: library part CMP-119553-3, "CAP CER 0.33UF 10V 10% X5R 0402"
C16 C20: library part CMP-19563753-2, "T&R / COMMERCIAL CHIP"
C17: library part CMP-8f214705328650e6-4, "Cap Ceramic 1uF 25V X5R 10% SMD 0402 85°C Cardboard T/R"
C18 C26: library part CMP-124577-2, "CAP CER 0.068UF 16V 10% X7R 0402"
C19: library part CMP-128367-2, "AVX   04025C332KAT2A   CAP, MLCC, X7R, 3.3NF, 50V, 0402"
C21 C35: library part CMP-7562325-2, "Cap Ceramic 1uF 16V X5R 10% SMD 0402 85C Paper T/R"
C27: library part CMP-8988077-2, "Multilayer Ceramic Capacitors MLCC - SMD/SMT 25volts 0.047uF 10% X7R 0402 SIZE"
C28 C29: library part CMP-3913259-2, "CAPACITOR, 0402, X7R, 50V, 220PF"
C31: library part CMP-128358-2, "AVX   04025A151JAT2A   CAP, MLCC, C0G/NP0, 150PF, 50V, 0402"
C32: library part CMP-fd5e350784e62299-2, "Cap Ceramic 10uF 6.3V X5R 20% SMD 0402 85°C Paper T/R"
D1 D2 D3 D4 D5 D6 D7 D8 D9 D10: library part CMP-zjatvudan2pmebzuzrjd-1, "Bidirectional 3.3V (Max) 5V 14.1V 11.2A(8/20us) SOD-882 Diodes - ESD RoHS"
D11 D12: library part CMP-7093b92408b7af54-1, "LED SMD Top View Uni-Color Brilliant Green 518nm 0603 Pkg ø7T/R 3k\""
FB1: library part CMP-887293-3, "Chip Ferrite Bead for High Speed Signal lines, 330 Ohm, 400 mA, -55 to 125 degC, 2 x 1.25 x 1.05 mm SMD, Tape and Reel"
L1: library part CMP-6756ab2d39beb891-1, "MGV252012 - High Current Molded SMT Power Inductor"
P1: library part CMP-4e52859dc8429195-26, "Wire-To-Board Terminal Block, 2, 150 V, 10 A, 30 Awg, 16 Awg, 1.4 Mm"
R1 R5 R20 R22 R23 R26 R27: library part CMP-3661304-2, "Thick Film Resistors - SMD 10K OHM 1%"
R2: library part CMP-3682312-2, "Thick Film Resistors - SMD 0402 88.7Kohms 1% Tol"
R3: library part CMP-3945506-8, "RES SMD 510K OHM 1% 1/16W 0402"
R6: library part CMP-3765204-2, "YAGEO   RC0402FR-13100RL   THICK FILM RESISTOR, 100 OHM, 62.5mW, 1%"
R7 R9: library part CMP-1900184-2, "RESISTOR, 0402 0.063W 1% 24K"
R8: library part CMP-2823544-2, "Res Thick Film 0402 1K Ohm 1% 0.063W(1/16W) ±100ppm/C Molded SMD Automotive Punched Paper T/R"
R10 R25: library part CMP-2823564-2, "Res Thick Film 0402 200K Ohm 1% 0.063W(1/16W) ±100ppm/C Molded SMD Automotive Punched Paper T/R"
R11 R12 R13 R17: library part CMP-3759242-3, "YAGEO   RC0402FR-13100KL   THICK FILM RESISTOR, 100KOHM, 62.5mW 1%"
R14: library part CMP-1856508-2, "RES SMD 6.8K OHM 1% 1/16W 0402"
R15: library part CMP-1853199-2, "YAGEO (PHYCOMP)   RC0402FR-0716KL   RESISTOR, 0402 0.063W 1% 16K"
R16: library part CMP-1853185-2, "RES SMD 11K OHM 1% 1/16W 0402"
R18: library part CMP-3656287-2, "Thick Film Resistors - SMD 0402 20Kohms 1% Tol"
R19 R24: library part CMP-1856416-2, "RES SMD 330K OHM 1% 1/16W 0402"
R21: library part CMP-9399996-2, "0402 8.2k ohms 1% automotive grade chip resistor"
R28 R30 R32 R33: library part CMP-1900348-2, "RES SMD 0.0 OHM JUMPER 1/16W"
R29: library part CMP-3679617-2, "Thick Film Resistors - SMD 0603 71.5ohms 1% Tol"
R31 R35: library part CMP-7833283-2, "Thick Film Resistors 1/16W 1M ohm 1%"
R34: library part CMP-1873487-2, "RES SMD 680K OHM 1% 1/10W 0603"
R36: library part CMP-1867363-2, "RES SMD 220 OHM 1% 1/16W 0402"
R37: library part CMP-9105019-2, "Thick Film Resistors - SMD 0402 1% 1.0Kohm Anti-Sulfur"
SH1: library part CMP-da641787f57f05a3-1, "EMI SHIELDING, 26.87 X 26.87 X 2.01MM; Product Range: Two-Piece SMS Series; Gasket Material: Tin Plated Steel;..."
SW1 SW2: library part CMP-hgui3ccx9uakpoe7vbsx-5, "SPST 50mA @ 12VDC Vertical Round Button 260gf SMD Tactile Switches RoHS"
SW3: library part CMP-c7970ef1edec1850-5, "Switch Slide DPDT Side Slide 0.3A 30VDC PC Pins Thru-Hole Bulk"
U1: library part CMP-313bfeb3df46eefc-3, "Rx Txrx Mod Wifi Trace Ant SMD"
U2: library part CMP-1489379-3, "Buck-Boost Voltage Converter with 1.8 to 5.5 V Input and 3.3 V Output, -40 to 85 degC, 10-Pin SON (DRC), Green (RoHS & no Sb/Br)"
U3: library part CMP-6f39a3c4d5dbb0fe-3, "1.5-V to 5.5-V, 1.5-A, 0.5-uA IQ ideal diode with Integrated FET 6-SC70 -40 to 105"
U4: library part CMP-6bc4a2c881d8b403-1, "Digital Potentiometer 10kOhm 256POS Volatile Linear Automotive 8-Pin SOT-23 T/R"
U5: library part CMP-b2327839c6726df5-7, "3.3-V Vref, dual-output Vref & Vref/2 voltage reference 5-SOT-23-THIN -40 to 125"
U6 U9 U10: library part CMP-cf0503be886010c2-1, "5MHz 15V/us High Slew-Rate RRIO Operational Amplifier 8-Pin SOIC T/R"
U7: library part CMP-1215678-2, "Micropower Instrumentation Amplifier Single and Dual Versions, -40 to 85 degC, 8-pin SOP (DGK8), Green (RoHS & no Sb/Br)"

## Free pads (board coordinates)
  round 2 smd: ""(2.06,16.245) ""(2.06,18.785) ""(2.06,21.325) ""(4.6,16.245) ""(4.6,18.785) ""(4.6,21.325)
  rrect50% 5x1.8 smd far side: ""(2.775,7.885) ""(2.775,12.965) ""(2.775,10.425)
  rrect50% 5x1.8 smd: ""(2.775,10.425) ""(2.775,7.885) ""(2.775,12.965)
  round 1.4 smd: ""(21.575,14.8) ""(23.35,8.925) ""(24.125,6.525) ""(32.75,3.525) ""(33.15,17.525)

## Via types
v1: diameter 0.6, hole 0.3, Top Layer to Bottom Layer, tented both sides, 158 vias
v2: diameter 0.6, hole 0.3, Top Layer to Bottom Layer, 17 vias

## Nets (pads, with @x,y where several pads share a name; then routed paths per layer and width w, separated by ;. In a path a pad name is that pad's centre, name@x,y a point inside that pad or via, vN(x,y) a via of type N, cw(c..) or ccw(c..) an arc to the next point about the centre after c; other vN are vias at no path point)
3V3: C4.1 C5.1 C21.1 C22.1 FB1.1 R3.2 R5.1 R27.1 U2.1 U5.3 U5.4 | length 16.2
  Top Layer w0.152: C5.1@18.3,22.3 18.7,21.9 18.7,19.585 C4.1 ; R3.2 C4.1@18.45,19.315 ; v1(25.05,20.5) R5.1 ; v1(31.175,24.6) R27.1@31.925,24.6
  Top Layer w0.381: U2.1 C5.1@18.3,22.3 ; C21.1 24.755,15.777 25.175,16.197 25.175,16.222 25.369,16.417 25.369,17.033 25.175,17.228 v1(25.175,18.45) ; U5.3 U5.4 C21.1@24.765,15.69
  other v1: 18.925,22.525 17.8,23.125 18.45,23.125 19.475,25.75 19.475,26.4
ADC: C13.1 pad.@33.15,17.525 R21.2 U1.9 U10.1 | length 10.4
  Top Layer w0.152: v1(31.9,18.05) 32.55,18.05 33.15,17.45 33.15,15.675 32.825,15.35 32.365,15.35 C13.1@32.365,14.385 ; U10.1 C13.1@32.533,14.217
  Bottom Layer w0.152: U1.9 30.5,17.325 31.225,18.05 v1(31.9,18.05)
BOOT0: D7.1 pad.@4.6,18.785 U1.25 | length 10.9
  Top Layer w0.254: D7.1@9.225,11.32 v1(9.225,11.925)
  Bottom Layer w0.152: v1(4.6,18.785) 6.475,16.91 6.475,14.675 v1(9.225,11.925) 9.825,11.325 U1.25@10.525,11.325
BUT_A: C6.1 D1.2 R5.2 SW1.2 U1.8 | length 37.4
  Top Layer w0.152: SW1.2 5.705,3.43 v1(6.25,3.975) ; v1(14.95,13.775) 14.95,14.925 v1(16.6,16.575) ; R5.2 C6.1@26.865,19.65 ; v1(26.875,18.75) C6.1
  Top Layer w0.254: v1(8.925,2.625) D1.2
  Bottom Layer w0.152: v1(6.25,3.975) 7.6,2.625 v1(8.925,2.625) 13.2,6.9 13.2,10.784 14.95,12.534 v1(14.95,13.775) ; v1(16.6,16.575) 17.705,17.68 25.33,17.68 26.4,18.75 v1(26.875,18.75) U1.8@28.22,18.75
BUT_B: C34.1 D2.2 R27.2 SW2.2 U1.6 | length 15.4
  Top Layer w0.152: v1(30.45,22.35) 32.05,22.35 32.805,23.105 C34.1 D2.2@32.805,26.14 ; D2.2@32.8,25.98 v1(32.8,26.875) ; v1(34.1,30.8) SW2.2@34.1,32.52
  Bottom Layer w0.152: U1.6 28.66,21.135 29.875,22.35 v1(30.45,22.35) ; v1(32.8,26.875) 34.1,28.175 v1(34.1,30.8)
CABLE_SCREEN: pad.@2.775,7.885 pad.@2.775,10.425 pad.@2.775,12.965 U6.1 U6.2 | length 25.6
  Top Layer w0.152: U6.1 U6.2 v1@13.985,14.99
  Bottom Layer w0.152: pad.@2.775,7.885 pad.@2.775,12.965 ; pad.@2.775,10.425 6.375,10.425 8.62,8.18 8.62,7.714 8.989,7.345 10.045,7.345 12.175,9.475 12.175,13.15 v1(14,14.975)
CS_N: U1.29 U4.6 | length 20.4
  Top Layer w0.152: v1(26.875,16.05) 27.25,16.425 28.264,16.425 28.832,15.857 U4.6
  Bottom Layer w0.152: U1.29 11.18,15.75 15.025,15.75 16.475,14.3 25.8,14.3 26.875,15.375 v1(26.875,16.05)
DBG_PWR: pad.@4.6,16.245 SW3.3 SW3.6 | length 22.5
  Bottom Layer w0.508: SW3.3 SW3.6 2.166,30.466 2.166,26.278 2.175,26.269 2.175,25.362 2.166,25.353 2.166,24.207 2.175,24.198 2.175,22.825 1.15,21.8 1.15,15.8 1.65,15.3 3.655,15.3 v1(4.6,16.245)
DVDD: C2.1 C3.1 FB1.2 R1.1 U1.2 | length 9.3
  Top Layer w0.152: FB1.2 23.275,24.285 R1.1
  Top Layer w0.508: FB1.2 C2.1 26.925,26.075 ; 26.925,26.075 27.175,26.325 v1(27.175,26.425) v1(27.175,25.825) 26.925,26.075
ELECTRODE_N: D4.2 pad.@2.775,10.425 R13.2 | length 10.1
  Top Layer w0.152: pad.@5,9.975 5.5,9.975 v1(6.275,9.2) ; v1(8.925,5.35) D4.2@9.795,5.35 ; D4.2 10.37,5.355 11.25,4.475 R13.2
  Bottom Layer w0.152: v1(6.275,9.2) 6.925,8.55 6.925,6.85 8.425,5.35 v1(8.925,5.35)
ELECTRODE_P: D5.2 pad.@2.775,7.885 R17.2 | length 11.3
  Top Layer w0.152: pad.@2.785,7.875 v1(6.275,7.875) ; v1(8.925,4.375) D5.2@9.78,4.375 ; D5.2 10.33,4.395 11.275,3.45 R17.2
  Bottom Layer w0.152: v1(6.275,7.875) 6.275,7.025 v1(8.925,4.375)
ELECTRODE_RLD: D3.2 pad.@2.775,12.965 R24.1 | length 11.4
  Top Layer w0.152: pad.@2.79,12.95 v1(6.075,12.95) ; v1(9.25,7.975) R24.1
  Top Layer w0.254: v1(9.25,7.975) D3.2
  Bottom Layer w0.152: v1(6.075,12.95) 6.775,12.25 6.775,10.45 v1(9.25,7.975)
ESP32_EN: C1.1 D8.1 pad.@2.06,16.245 R1.2 U1.3 | length 36.1
  Top Layer w0.152: v1(9.25,15.375) 10.478,15.375 11.878,16.775 15.3,16.775 16.205,17.68 23.505,17.68 v1(24.288,18.463) ; v1(24.85,21.475) 24.85,21.498 25.875,22.523 R1.2 26.815,22.535 26.9,22.62 v1(26.9,23.35)
  Top Layer w0.254: v1(9.25,15.375) D8.1
  Bottom Layer w0.152: v1(2.06,16.245) 3.325,17.51 3.325,18.75 3.99,19.415 5.21,19.415 v1(9.25,15.375) ; v1(24.288,18.463) 24.288,20.912 v1(24.85,21.475) ; v1(26.9,23.35) 26.9,23.825 U1.3@27.7,24.625
ESP32_RX: D10.1 pad.@2.06,18.785 U1.34 | length 12.4
  Top Layer w0.152: D10.1 v1(9.325,23.025)
  Bottom Layer w0.152: v1(2.06,18.785) 3.5,20.225 3.5,21.75 4.775,23.025 v1(9.325,23.025) 9.945,22.405 U1.34
ESP32_TX: D9.1 pad.@2.06,21.325 U1.35 | length 10.4
  Top Layer w0.254: v1(9.375,23.901) D9.1
  Bottom Layer w0.152: v1(2.06,21.325) 4.636,23.901 v1(9.375,23.901) 10.649,23.901 U1.35@10.675,23.875
FILTER_OUT: C14.2 C15.1 pad.@32.75,3.525 R16.2 R20.1 U10.7 | length 11.1
  Top Layer w0.152: R16.2 29.35,10.525 31.263,8.612 U10.7 C14.2@31.263,4.033 ; C14.2 31.455,3.525 pad.@32.75,3.525
GND: C1.2 C2.2 C3.2 C5.2 C6.2 C7.2 C8.2 C9.2 C10.2 C11.2 C12.2 C21.2 C22.2 C23.2 C24.2 C32.2 C33.2 C34.2 C35.2 C36.2 D1.1 D2.1 D3.1 D4.1 D5.1 D6.1 D7.2 D8.2 D9.2 D10.2 D11.2 D12.2 P1.2 pad.@4.6,21.325 R2.1 R30.1 R35.2 SH1.1 SW1.1 SW2.1 U1.1 U1.15 U1.38 U1.39 U2.3 U2.9 U2.11 U3.2 U3.3 U3.5 U4.3 U5.2 U6.4 U7.4 U9.4 U10.4 | length 58.3
  Top Layer w0.152: SW1.1 v1@1.345,3.695 ; v1(1.9,5.15) D12.2 ; R35.2 C36.2@9.96,19.225 ; R35.2@9.15,19.3 v1(9.15,20.075) ; v1(9.325,21.05) D10.2 ; R30.1 11.29,12.825 11.665,12.45 U6.4 v1(13.975,12.45) ; v1(10.625,6.175) C9.2@10.625,6.76 ; U3.3 U3.2 11.55,24.115 ; U3.5 11.55,24.115 ; v1@12.21,24.115 11.55,24.115 ; C8.2 R2.1 ; v2(15.05,20.825) U2.3 ; R2.1@15.55,18.475 U2.9 U2.11@15.55,20.325 ; U9.4@18.275,10.723 v1(18.275,11.475) ; U7.4 v1(20.5,2.975) ; C10.2 v1@20.53,15.72 ; C12.2 v1@25.835,3.335 ; v1@25.855,21.595 C1.2 C6.2 ; C33.2 28.71,20.276 29.734,21.3 v1(29.75,21.3) ; U10.4 28.723,12.377 v1(29.7,11.4) ; U4.3 C33.2@28.832,19.478 ; SW2.1@30.07,32.85 32.575,32.85 33.2,32.225 33.2,30.1 D11.2 SH1.1@32.95,28.15 ; v1(31.05,23.225) 31.55,23.225 C34.2 ; v1(32.135,5.065) C11.2
  Top Layer w0.254: v1(8.925,6.225) 9.57,6.225 D4.1 ; v1(9.05,25.975) 9.375,25.65 D9.2 ; D3.1 D7.2 ; D8.2 v1(9.25,17.5) ; D5.1 10.345,3.21 D1.1 ; D1.1@10.495,2.475 v1(11.125,2.475) ; C7.2 C32.2 v1(12.525,20.05) ; C32.2@12.725,21.075 13.4,21.075 ; C32.2@12.775,20.625 13.325,20.625 ; D6.1 13.35,26.55 v1(13.65,26.85) ; 16.8,20.575 C5.2@17.625,20.575 ; 16.8,21.075 C5.2@17.575,21.075 ; v1(20.675,13.65) 21.215,13.65 C24.2 ; U5.2@23.8,10.615 v1(23.8,11.55) ; v1(23.925,24.725) C2.2 v1(24.975,23.75) ; C2.2@25.435,25.035 26.275,25.035 v1(26.275,24.325) ; C3.2@26.485,24.975 v1(27.05,24.975) ; v1@31.5,25.975 D2.1
  Top Layer w0.381: C23.2@23.83,16.725 v1(24.625,16.725) ; C22.2 C21.2 C23.2@23.875,16.68
  other v1: 6.125,0.7 0.825,0.775 21.45,1.1 24.575,1.1 27.875,1.1 31.225,1.1 11.65,1.125 15.275,1.125 18.3,1.125 7.85,1.175 34.65,1.175 25.85,3.35 1.35,3.7 7.85,4.45 34.7,4.8 0.7,6.425 14.85,7.3 7.825,7.4 34.7,8.55 29.675,9.2 9.25,10 7.575,11.225 26.125,11.375 6.125,11.425 15.2,11.425 34.7,12.1 5.55,14.55 7.625,14.55 0.7,14.575 34.7,14.925 20.55,15.7 34.725,18.175 7.85,18.25 31.875,19.275 6.425,19.825 34.7,21.25 4.6,21.325 7.825,21.325 25.85,21.6 23.925,21.7 32.725,22.1 0.7,22.825 12.225,24.1 18.225,24.425 21.825,24.475 34.7,24.525 7.8,24.6 31.4,25.975 6.275,26.825 7.825,27.175 34.675,27.8 16.8,27.95 9.475,27.975 12.725,27.975 20.575,27.975 24.05,27.975 27.05,27.975 31.1,28 0.7,28.3 5.025,28.325
  other v2: 20.425,18.35 21.825,18.35 19.725,19.05 21.125,19.05 22.525,19.05 20.425,19.775 21.825,19.775 14.3,20.325 15.8,20.325 19.725,20.475 21.125,20.475 22.525,20.475 20.425,21.15 21.825,21.15 14.3,21.325 15.8,21.325
GRN_LED: R36.2 U1.11 | length 15.8
  Top Layer w0.152: v1(30.3,23.975) R36.2
  Bottom Layer w0.152: U1.11 30.91,14.785 33.5,17.375 33.5,22.375 31.905,23.97 30.305,23.97 v1(30.3,23.975)
INAMP_OUT: C27.1 C30.1 pad.@23.35,8.925 R14.1 R18.2 R19.2 U7.6 | length 17.4
  Top Layer w0.152: R19.2 19.75,10.925 21.75,8.925 23.35,8.925 v1(24.3,7.975) 24.775,8.45 R14.1 C30.1 ; v1(22.025,5.025) 22.025,3.975 22.375,3.625 U7.6 ; C27.1 R18.2@26.275,9.425
  Bottom Layer w0.152: v1(22.025,5.025) 24.3,7.3 v1(24.3,7.975)
MISO: U1.31
MOSI: U1.37 U4.5 | length 23.2
  Top Layer w0.152: v1(17.825,26.2) 19.525,24.5 20.075,24.5 25.888,18.687 25.888,16.112 26.6,15.4 27.966,15.4 U4.5
  Bottom Layer w0.152: U1.37@11.21,26.55 11.585,26.175 11.61,26.2 v1(17.825,26.2)
NetC8_1: C8.1 R6.1 U2.6 U2.7 U2.8 | length 3.4
  Top Layer w0.152: R6.1 C8.1 14.05,18.54 U2.6 U2.7 U2.8
NetC14_1: C14.1 C15.2 R10.2 R14.2 R15.1 | length 8.5
  Top Layer w0.152: R14.2@25.425,7.425 R15.1 25.425,5.834 27.064,4.195 28.532,4.195 29.2,4.863 R10.2 C15.2 C14.1
NetC16_1: C16.1 C19.2 C28.1 R13.1 | length 3.1
  Top Layer w0.152: R13.1 C16.1@15.735,4.475
NetC16_2: C16.2 R11.2 U7.2 | length 2.4
  Top Layer w0.152: C16.2@16.815,4.275 U7.2
NetC17_1: C17.1 R19.1 U6.6 | length 2.3
  Top Layer w0.152: U6.6 19.675,13.72 R19.1@19.675,12.885
NetC17_2: C17.2 U6.7 U7.5 | length 19.3
  Top Layer w0.152: v1(16.7,8.225) 16.05,8.875 16.05,14.175 16.865,14.99 U6.7 19.435,14.99 C17.2 ; v1(21.95,2.975) U7.5
  Bottom Layer w0.152: v1(16.7,8.225) v1(21.95,2.975)
NetC18_2: C18.2 C27.2 C30.2 R15.2 U10.5 | length 4.3
  Top Layer w0.152: R15.2 27.305,6.525 27.325,6.545 C30.2 ; C27.2 26.28,7.57 C30.2 ; U10.5@28.525,7.57 C30.2
NetC19_1: C19.1 C20.2 C29.1 R17.1 | length 3.1
  Top Layer w0.152: R17.1 C20.2
NetC20_1: C20.1 R12.2 U7.3 | length 2.4
  Top Layer w0.152: C20.1@16.815,3.625 U7.3
NetC25_2: C25.2 C26.2 R16.1 U10.3 | length 6.1
  Top Layer w0.152: C26.2 27.34,12.42 R16.1@27.34,11.385 ; C25.2 27.448,12.41 28.1,13.062 28.1,13.475 28.375,13.75 29.5,13.75 29.993,13.257 U10.3
NetC31_1: C31.1 R24.2 R31.2 U9.7 | length 3.8
  Top Layer w0.152: R31.2 11.285,9 R24.2@11.285,7.99 ; C31.1 12.117,8.168 U9.7
NetC31_2: C31.2 R22.1 R31.1 U9.6 | length 3.6
  Top Layer w0.152: R22.1 10.4,9.95 10.485,9.865 C31.2 11.637,9.528 12.81,9.528 U9.6
NetC35_1: C35.1 R28.1 R30.2 U6.3 | length 3.5
  Top Layer w0.152: R30.2@10.345,13.72 C35.1@11.3,13.72 ; C35.1 C35.1@11.3,13.72 ; R28.1@11.3,14.75 C35.1@11.3,13.72 ; U6.3 C35.1@11.3,13.72
NetD6_2: D6.2 SW3.2 SW3.5 U3.1 | length 13.9
  Top Layer w0.254: v1(9.55,26.701) v1(9.55,26.701)
  Top Layer w0.381: v1(9.55,26.701) 12.2,26.7 U3.1
  Bottom Layer w0.508: SW3.2 4.675,30.4 6.125,28.95 7.302,28.95 v1(9.55,26.701)
NetD11_1: D11.1 R36.1 | length 5.3
  Top Layer w0.152: R36.1 v1(30.3,26.425) ; v1(30.3,29.85) D11.1
  Bottom Layer w0.152: v1(30.3,26.425) v1(30.3,29.85)
NetD12_1: D12.1 R37.1 | length 26
  Top Layer w0.152: D12.1 v1(5.35,5.15) ; v1(26.7,2.8) R37.1
  Bottom Layer w0.152: v1(5.35,5.15) 5.35,3.225 6.73,1.845 25.745,1.845 v1(26.7,2.8)
NetL1_1: L1.1 U2.4 | length 2.2
  Top Layer w0.254: L1.1 14,23.55 14.55,23 U2.4
NetL1_2: L1.2 U2.2 | length 2.2
  Top Layer w0.254: U2.2 15.55,23 16.1,23.55 L1.2
NetR7_2: R7.2 R9.1 U9.3 | length 6.8
  Top Layer w0.152: U9.3 20.212,9.438 21.35,8.3 21.35,6.25 ; R7.2 21.35,6.25 ; R9.1 21.35,6.25
NetR18_1: R18.1 R20.2 R25.2 U10.6 | length 6.1
  Top Layer w0.152: R18.1 28.325,9.525 29.993,7.857 U10.6 R20.2@29.993,6.132 ; R25.2 R20.2
NetR32_2: R32.2 U5.5 | length 1.4
  Top Layer w0.381: U5.5 R32.2
NetR33_2: R33.2 U5.1 | length 1.4
  Top Layer w0.381: R33.2 U5.1
PA0: R8.1 R23.1 U4.8 | length 2.5
  Top Layer w0.152: R8.1 R23.1 29.6,14.481 30.132,15.013 U4.8
PB0: R21.1 R26.1 U4.7 | length 5.3
  Top Layer w0.152: U4.7 29.482,16.257 29.901,16.676 v1(30.026,16.676) ; R26.1 R21.1@32.365,16.2 ; 31.9,16.225 v1(31.9,17.175)
  Bottom Layer w0.152: v1(30.026,16.676) 30.499,16.676 30.998,17.175 v1(31.9,17.175)
PW0: C13.2 R23.2 R26.2 U4.1 U10.2 | length 7.7
  Top Layer w0.152: U4.1 30.132,17.462 30.725,16.869 30.725,15.075 C13.2@31.415,14.385 ; R23.2@30.485,14.385 C13.2@31.415,14.385 ; U10.2 C13.2@31.263,14.163 ; R26.2 C13.2@31.415,14.385 ; C13.2 C13.2@31.415,14.385
RED_LED: R37.2 U1.16 | length 9.6
  Top Layer w0.152: R37.2 v1(29.15,2.8)
  Bottom Layer w0.152: U1.16@24.065,9.508 29.15,4.423 v1(29.15,2.8)
RG1: R7.1 R29.1 U7.1 | length 3.2
  Top Layer w0.152: U7.1 19.225,5.575 R7.1 19.9,6.725 R29.1
RG2: R9.2 R29.2 U7.8 | length 3.2
  Top Layer w0.152: R29.2 22.8,6.725 R9.2 23.425,5.625 U7.8
RLD_BUF: R22.2 U9.1 U9.2 | length 9.9
  Top Layer w0.152: R22.2 11.36,10.85 12.135,10.075 13.675,10.075 16.032,7.718 16.852,6.898 U9.1 U9.2
SCK: U1.30 U4.4 | length 20.9
  Top Layer w0.152: v1(26.525,17.925) 27.15,17.925 27.541,18.316 U4.4
  Bottom Layer w0.152: U1.30 11.175,17.325 12.025,16.475 15.525,16.475 17.025,14.975 25.766,14.975 26.23,15.439 26.23,17.63 v1(26.525,17.925)
VBATT: P1.1 SW3.1 SW3.4 | length 9
  Top Layer w0.254: P1.1 P1.1@3.695,27.175
  Top Layer w0.508: P1.1@3.695,27.175 5.05,27.175 7.175,29.3 SW3.1
VBATT_MON: C36.1 R34.2 R35.1 U1.7 | length 22.8
  Top Layer w0.152: R35.1 R34.2@11.275,18.375 ; R34.2 v1(12.275,17.425)
  Bottom Layer w0.152: v1(12.275,17.425) 14.716,17.425 19.641,22.35 26.2,22.35 26.9,21.65 26.9,20.925 U1.7@27.96,19.865
VBATT_SW: C7.1 C32.1 R6.2 R34.1 U2.5 U3.6 | length 8.9
  Top Layer w0.152: C7.1 10.955,21.755 10.55,21.35 10.55,20.4 R34.1 11.775,19.175 R6.2
  Top Layer w0.381: C7.1 C32.1 ; U3.6 12.2,21.825 12.27,21.755 C32.1 ; U2.5 13.07,22.3 C32.1
VCC: C9.1 C10.1 C11.1 C12.1 C23.1 C33.1 pad.@21.575,14.8 R32.1 U4.2 U6.8 U7.7 U9.8 U10.8 | length 16.1
  Top Layer w0.152: C9.1@11.367,6.898 U9.8 ; v1(11.5,6.175) C9.1@11.5,6.765 ; U6.8 18.244,16.263 18.638,16.263 18.975,16.6 C10.1 v1(20.55,16.6) ; pad.@21.575,14.8 22.375,15.6 R32.1 ; U7.7 C12.1@24.94,4.275 ; C12.1@25.025,4.36 v1@25.84,4.36 ; U4.2 C33.1@29.482,19.492 ; C33.1@29.75,19.76 v1(29.75,20.425) ; U10.8 32.533,6.917 33.015,6.435 C11.1 v1(33.015,5.06)
  Top Layer w0.381: R32.1 C23.1@22.865,16.69
  Top Layer w0.508: v1@22.05,16.475 v1@22.05,17 ; v1(22.1,16.425) 22.413,16.738 ; 22.1,16.75 C23.1 ; v1(22.1,17.05) 22.125,17.05 22.425,16.75
  other v1: 25.85,4.35
VFB: C4.2 R2.2 R3.1 U2.10 | length 3.2
  Top Layer w0.152: U2.10 16.05,18.875 R2.2 R3.1 17.56,18.335 C4.2
VREF: C18.1 C24.1 C25.1 C26.1 C28.2 C29.2 pad.@24.125,6.525 R8.2 R10.1 R11.1 R12.1 R25.1 R28.2 R33.1 U6.5 U9.5 | length 15.6
  Top Layer w0.152: v1(9.55,14.575) R28.2@10.325,14.575 ; U9.5 v1@12.81,11.41 ; C29.2@13.695,2.55 v1(14.5,2.55) ; C28.2@13.695,5.375 v1(14.5,5.375) ; v1(16.875,2.55) R12.1@17.6,2.55 ; v1(16.875,5.375) R11.1@17.575,5.375 ; v1(17,12.45) U6.5 ; pad.@24.125,6.525 v1(24.8,5.45) ; C26.1 26.85,13.28 ; C18.1 v1(27.325,4.825) R10.1@28.25,4.825 ; C25.1 27.34,13.28 26.85,13.28 ; R8.2@27.65,14.225 v1(26.85,14.225) 26.85,13.28 ; R10.1 R25.1
  Top Layer w0.381: R33.1 C24.1
  Top Layer w0.508: 20.985,12.485 v1(20.675,12.175) v1(20.675,12.775) 20.965,12.485 C24.1
  other v1: 12.825,11.425
pads on no net: U1.4 U1.5 U1.10 U1.12 U1.13 U1.14 U1.17 U1.18 U1.19 U1.20 U1.21 U1.22 U1.23 U1.24 U1.26 U1.27 U1.28 U1.32 U1.33 U1.36 U3.4

## Polygon pours and split planes (outlines as drawn)
GND on Power Layer 2 "GND Layer" (solid, remove dead copper, pour order 2): 0,0 36,0 36,28.75 0,28.75
VCC on Power Layer 1 "VCC Plane" (solid, remove dead copper, pour order 3): 12,5.8 10.4,5.8 9.8,5.8 7.2,8.4 7.2,17.5 25.6,17.5 29.8,21.7 36,21.7 36,0 24.3,0 24.3,4.7 26.2,4.7 26.2,3.5 27,2.7 31.2,2.7 32.2,3.7 32.2,16.3 30.8,17.7 29,17.7 27,15.7 25,15.7 19.4,15.7 10,15.7 9,14.7 9,9.5 11,7.5 12,7.5
VREF on Power Layer 1 "VREF Plan" (solid, remove dead copper, pour order 5): 0,0 24.2,0 24.2,4.5 24.2,4.8 26,4.8 26.3,4.8 26.3,2.8 31,2.8 31.2,2.8 32,3.6 32.1,3.7 32.1,6.5 32.1,16.2 31.7,16.6 30.8,17.5 30.4,17.5 29,17.5 28.2,16.7 27.1,15.6 26.1,15.6 10.1,15.6 9.7,15.2 9.125,14.625 9.125,9.575 9.5,9.2 11.1,7.6 11.8,7.6 12.1,7.6 12.1,5.7 9.8,5.7 8.6,6.9 7.1,8.4 7.1,10.9 7.1,14.4 7.1,14.5 0,14.5
3V3 on Power Layer 1 "3V3 Plane" (solid, remove dead copper, pour order 7): 0,14.6 7.1,14.6 7.1,17.6 25.4,17.6 28.6,20.8 29.6,21.8 32.9,21.8 36,21.8 36,28.75 0,28.75
GND on Bottom Layer "Bottom GND" (solid, remove dead copper, pour order 9): 0,0 0,28.6 36,28.6 36,0
GND on Top Layer "Top GND" (solid, remove dead copper, pour order 11): 0,0 7.9,0 7.8,0.1 7.8,17.5 34.9,17.5 34.9,28.4 10.753,28.4 10.453,28.7 0,28.7

## Keep-outs
Keep-Out Layer:
  lines w0.254: 0,1 ccw(c1,1) 1,0 35,0 ccw(c35,1) 36,1 36,34 ccw(c35,34) 35,35 1,35 ccw(c1,34) 0,34 0,1

## Other copper
Top Layer:
  rectangle net 3V3: 17.375,21.825 19.425,23.525
  rectangle net 3V3: 19.25,25.575 20.025,26.575
  pour cut-out: 24.825,17.85 8.3,17.85 8.3,17.125 24.825,17.125
  pour cut-out: 12.95,22.875 17.15,22.875 17.15,25.675 12.95,25.675
  pour cut-out: 19.25,8.5 23.5,8.5 23.5,6.25 24,5.75 24,5.05 18.675,5.05 18.675,5.75 19.25,6.325
Power Layer 2:
  pour cut-out: 24.825,17.85 9.7,17.85 9.7,17.125 24.825,17.125
Bottom Layer:
  rectangle net DVDD: 27.125,25.775 27.825,26.55
  pour cut-out: 24.825,17.85 10,17.85 10,17.125 24.825,17.125

## Silkscreen, mask and mechanical layers (free items; w line width, h text height)
Top Overlay:
  text "B" at 34.4,29.225 h1.22
  text "+" at 1,27.9 h1.22 r180
  text "-" at 0.825,24.425 h1.22 r270
  text "ADC" at 31.15,18.725 h0.91
  text "+V" at 20.55,15.925 h0.91
  text "R" at 5.575,13.35 h1.22 r270
  text "N" at 5.575,10.825 h1.22 r270
  text "IA" at 20.95,8.8 h0.91
  text "P" at 5.55,8.225 h1.22 r270
  text "REF" at 24.45,4.775 h0.91
  text "A" at 0.775,4.55 h1.22
  text "FTR" at 29.45,2.05 h0.91
Bottom Overlay:
  text "ON" at 6.225,32.775 h1.22 r180
  text "OFF" at 0.75,32.75 h1.22 r180
  text "+" at 1,27.9 h1.22 r180
  text "-" at 0.825,24.425 h1.22 r270
Mechanical 1:
  the board outline again, w0.254